# Altium PCB Main.PcbDoc (part 1 of 3)
Units mm, origin at the board's own origin, x right, y up, seen from the top; angles counter-clockwise.
Board outline 100 x 100 mm, 4 copper layers (Top Layer, Layer 2, Layer 3, Bottom Layer), stack 1.606 mm thick; 196 components, 147 nets, 684 pads, 739 vias.
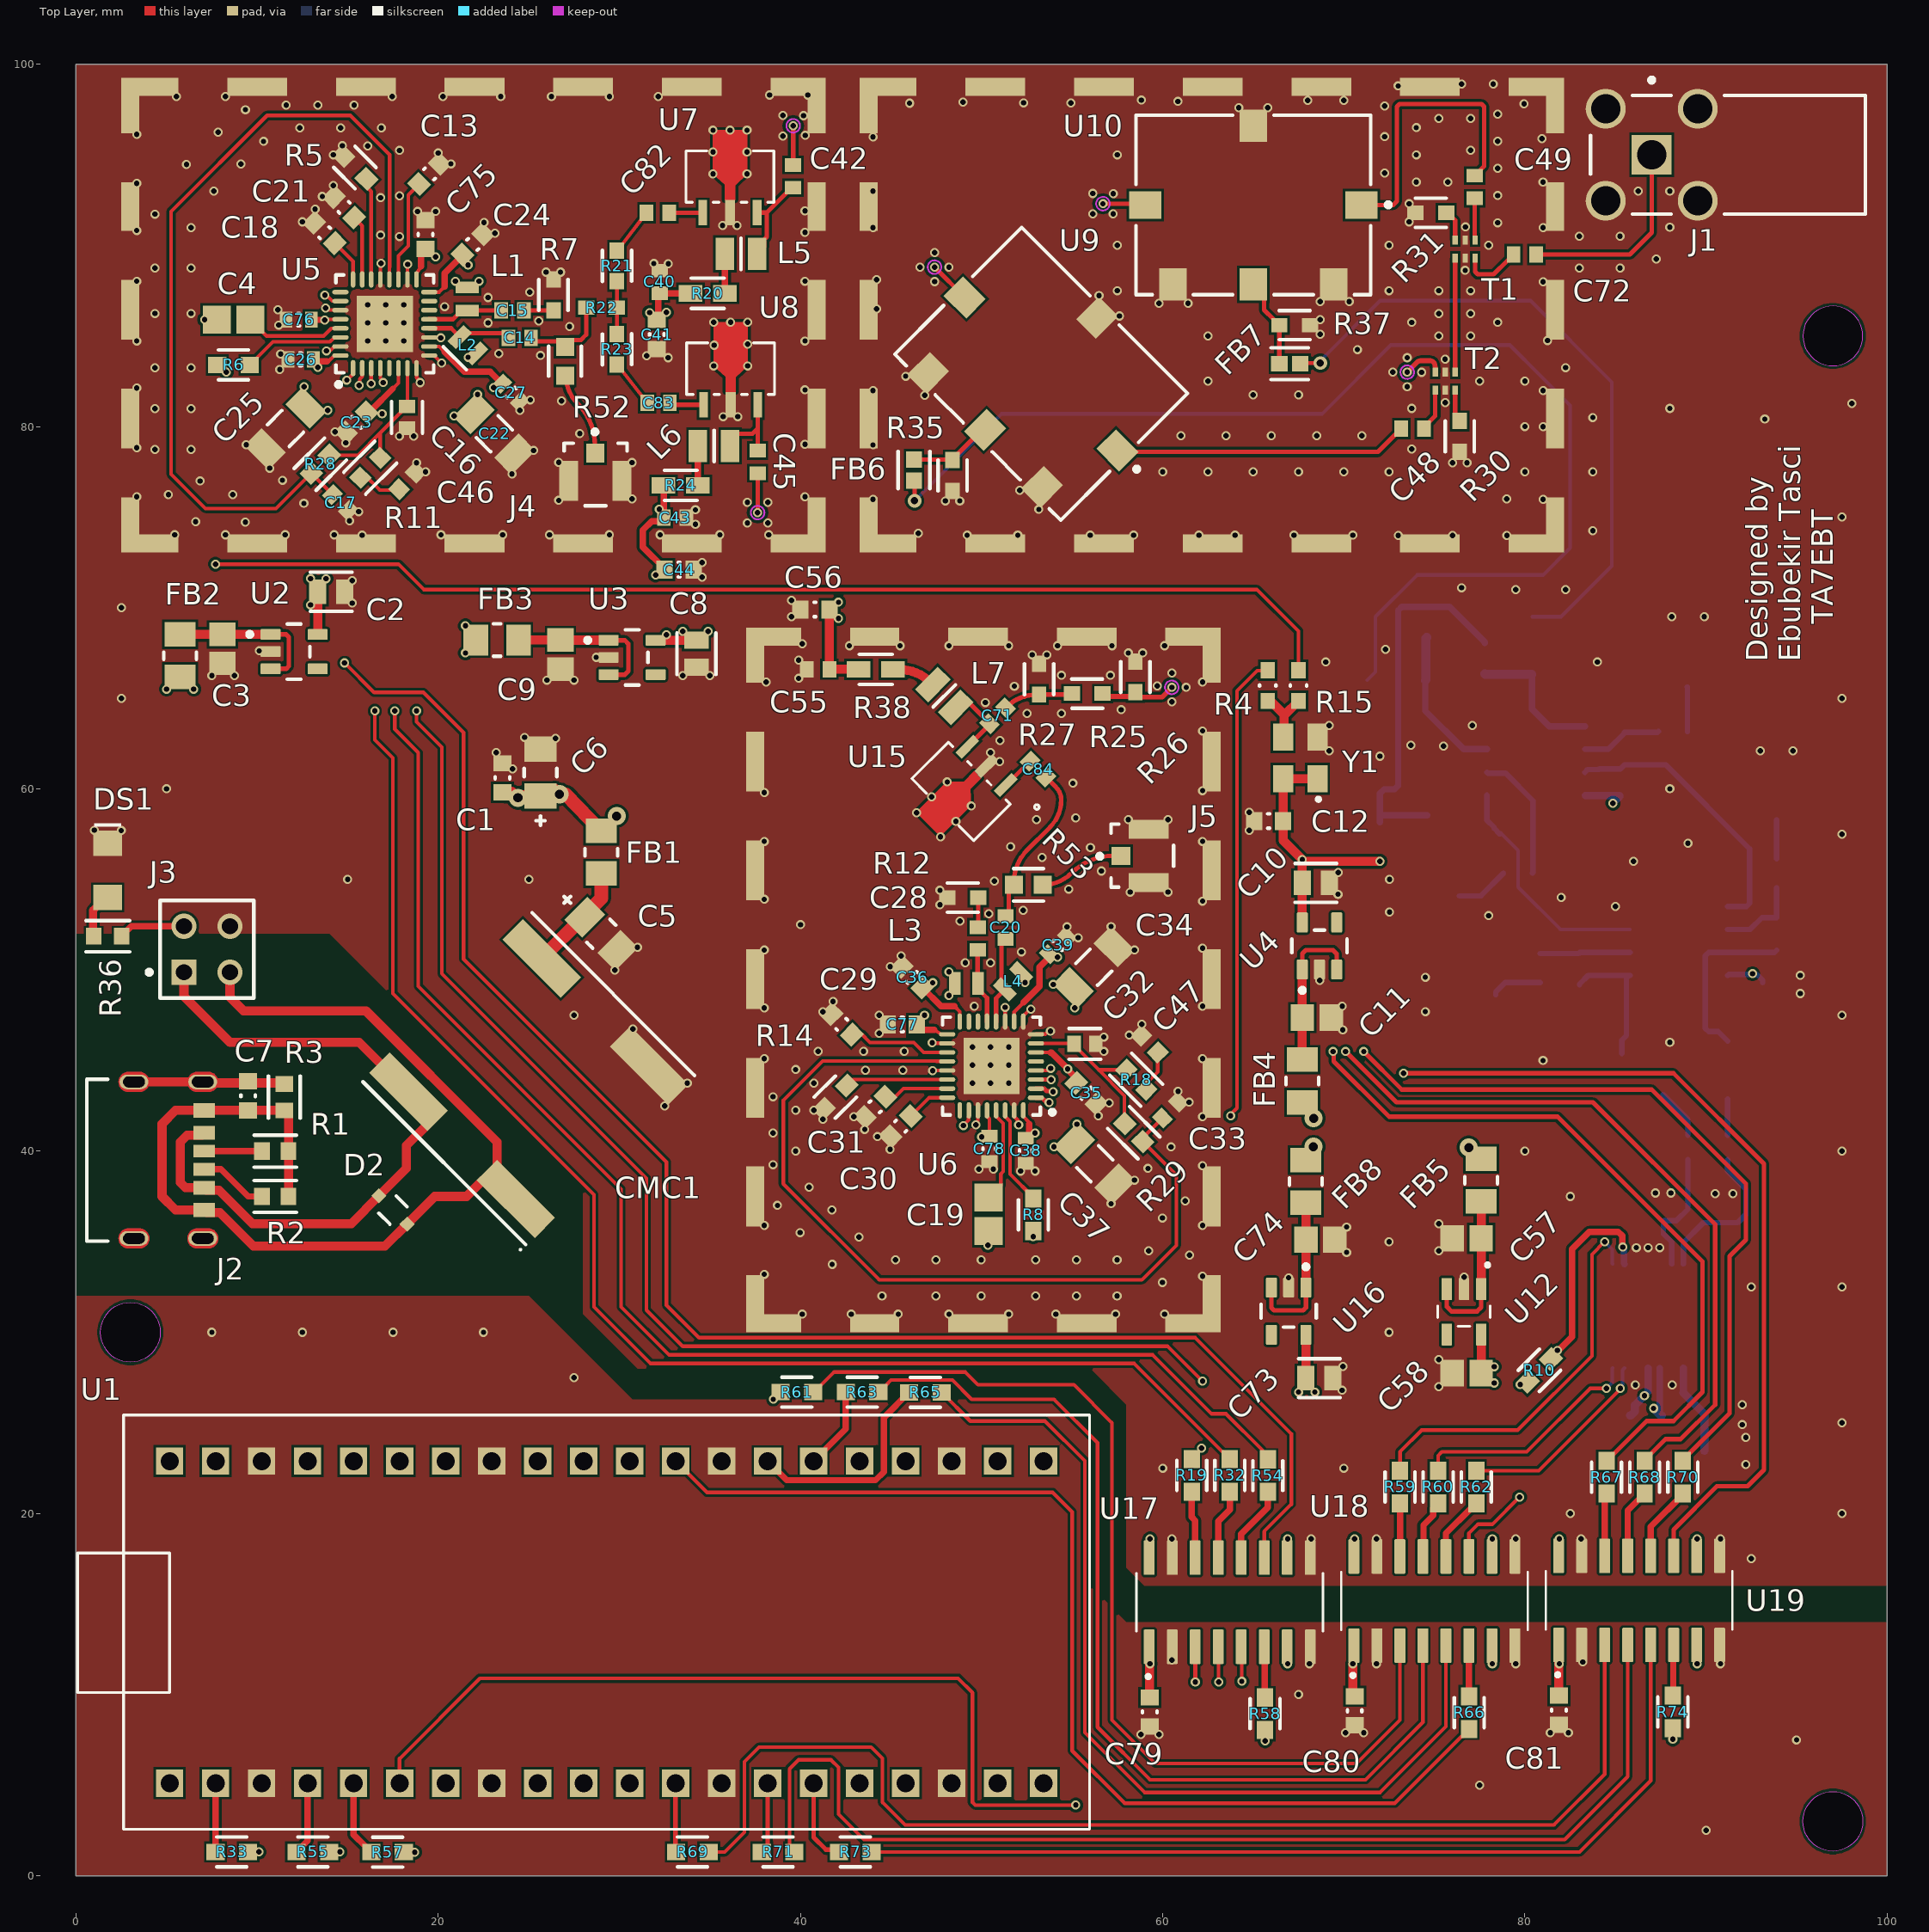
[diagram p0: Top Layer view]
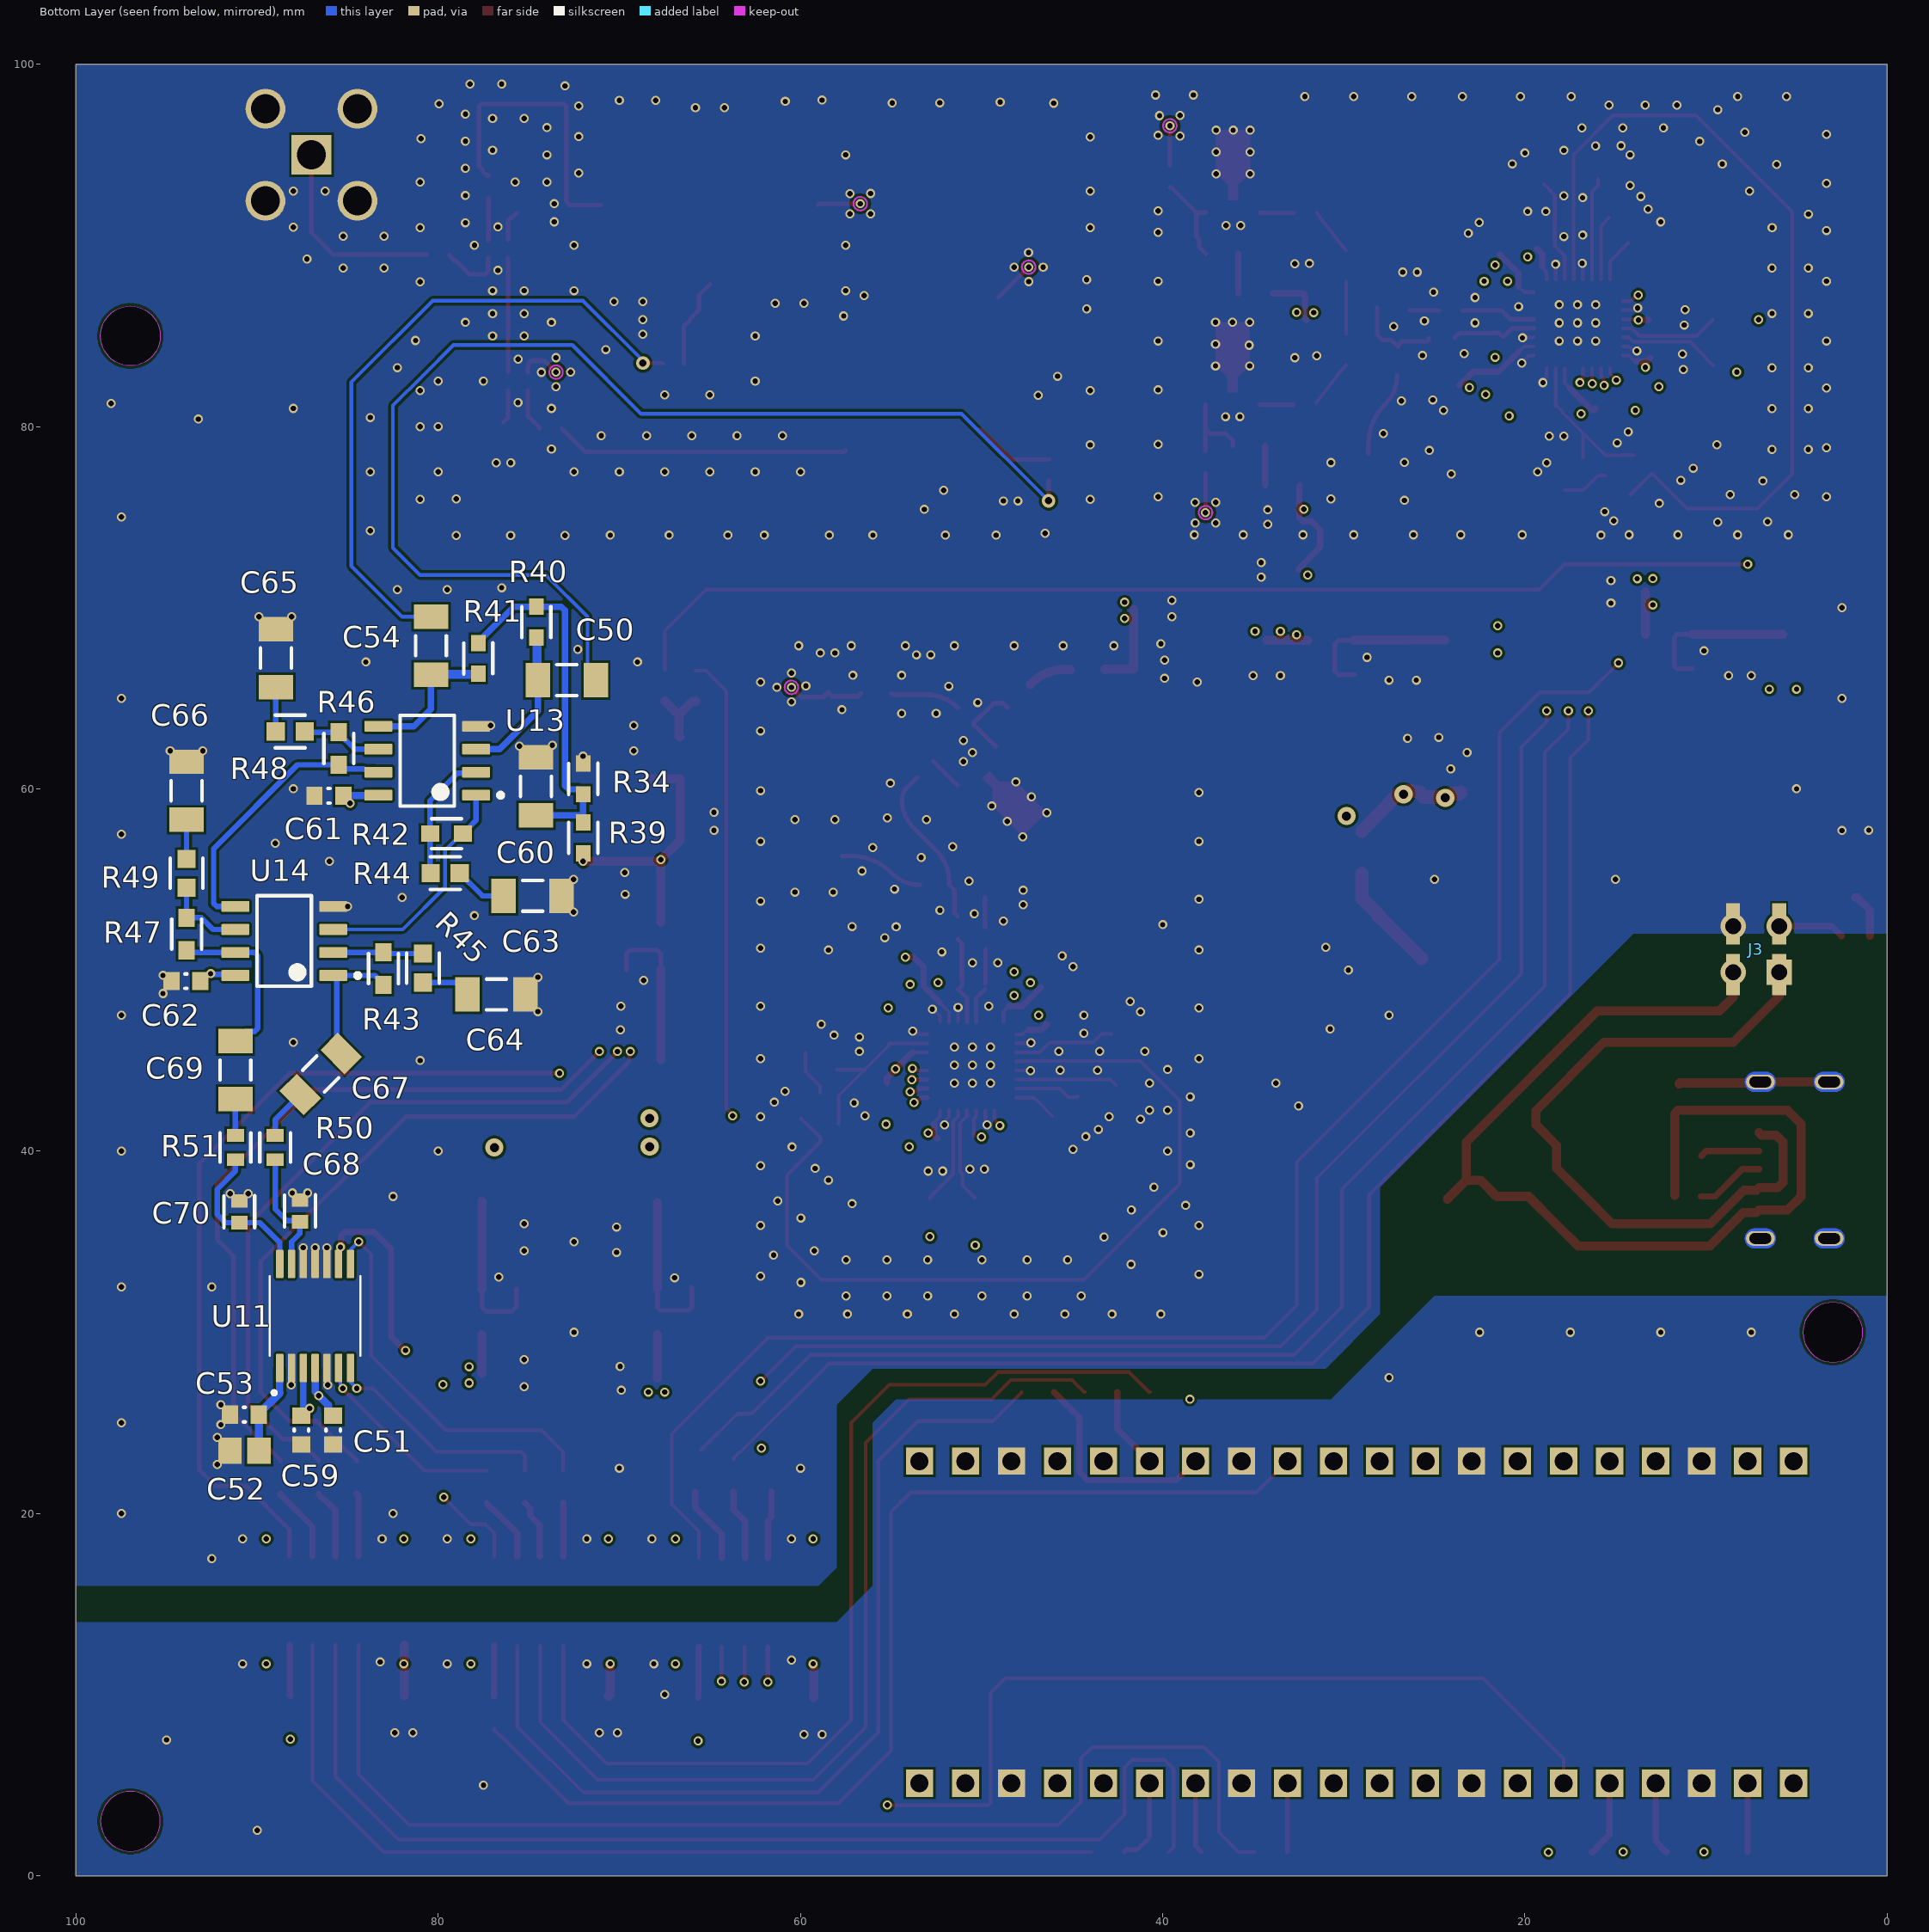
[diagram p1: Bottom Layer view, seen from below]
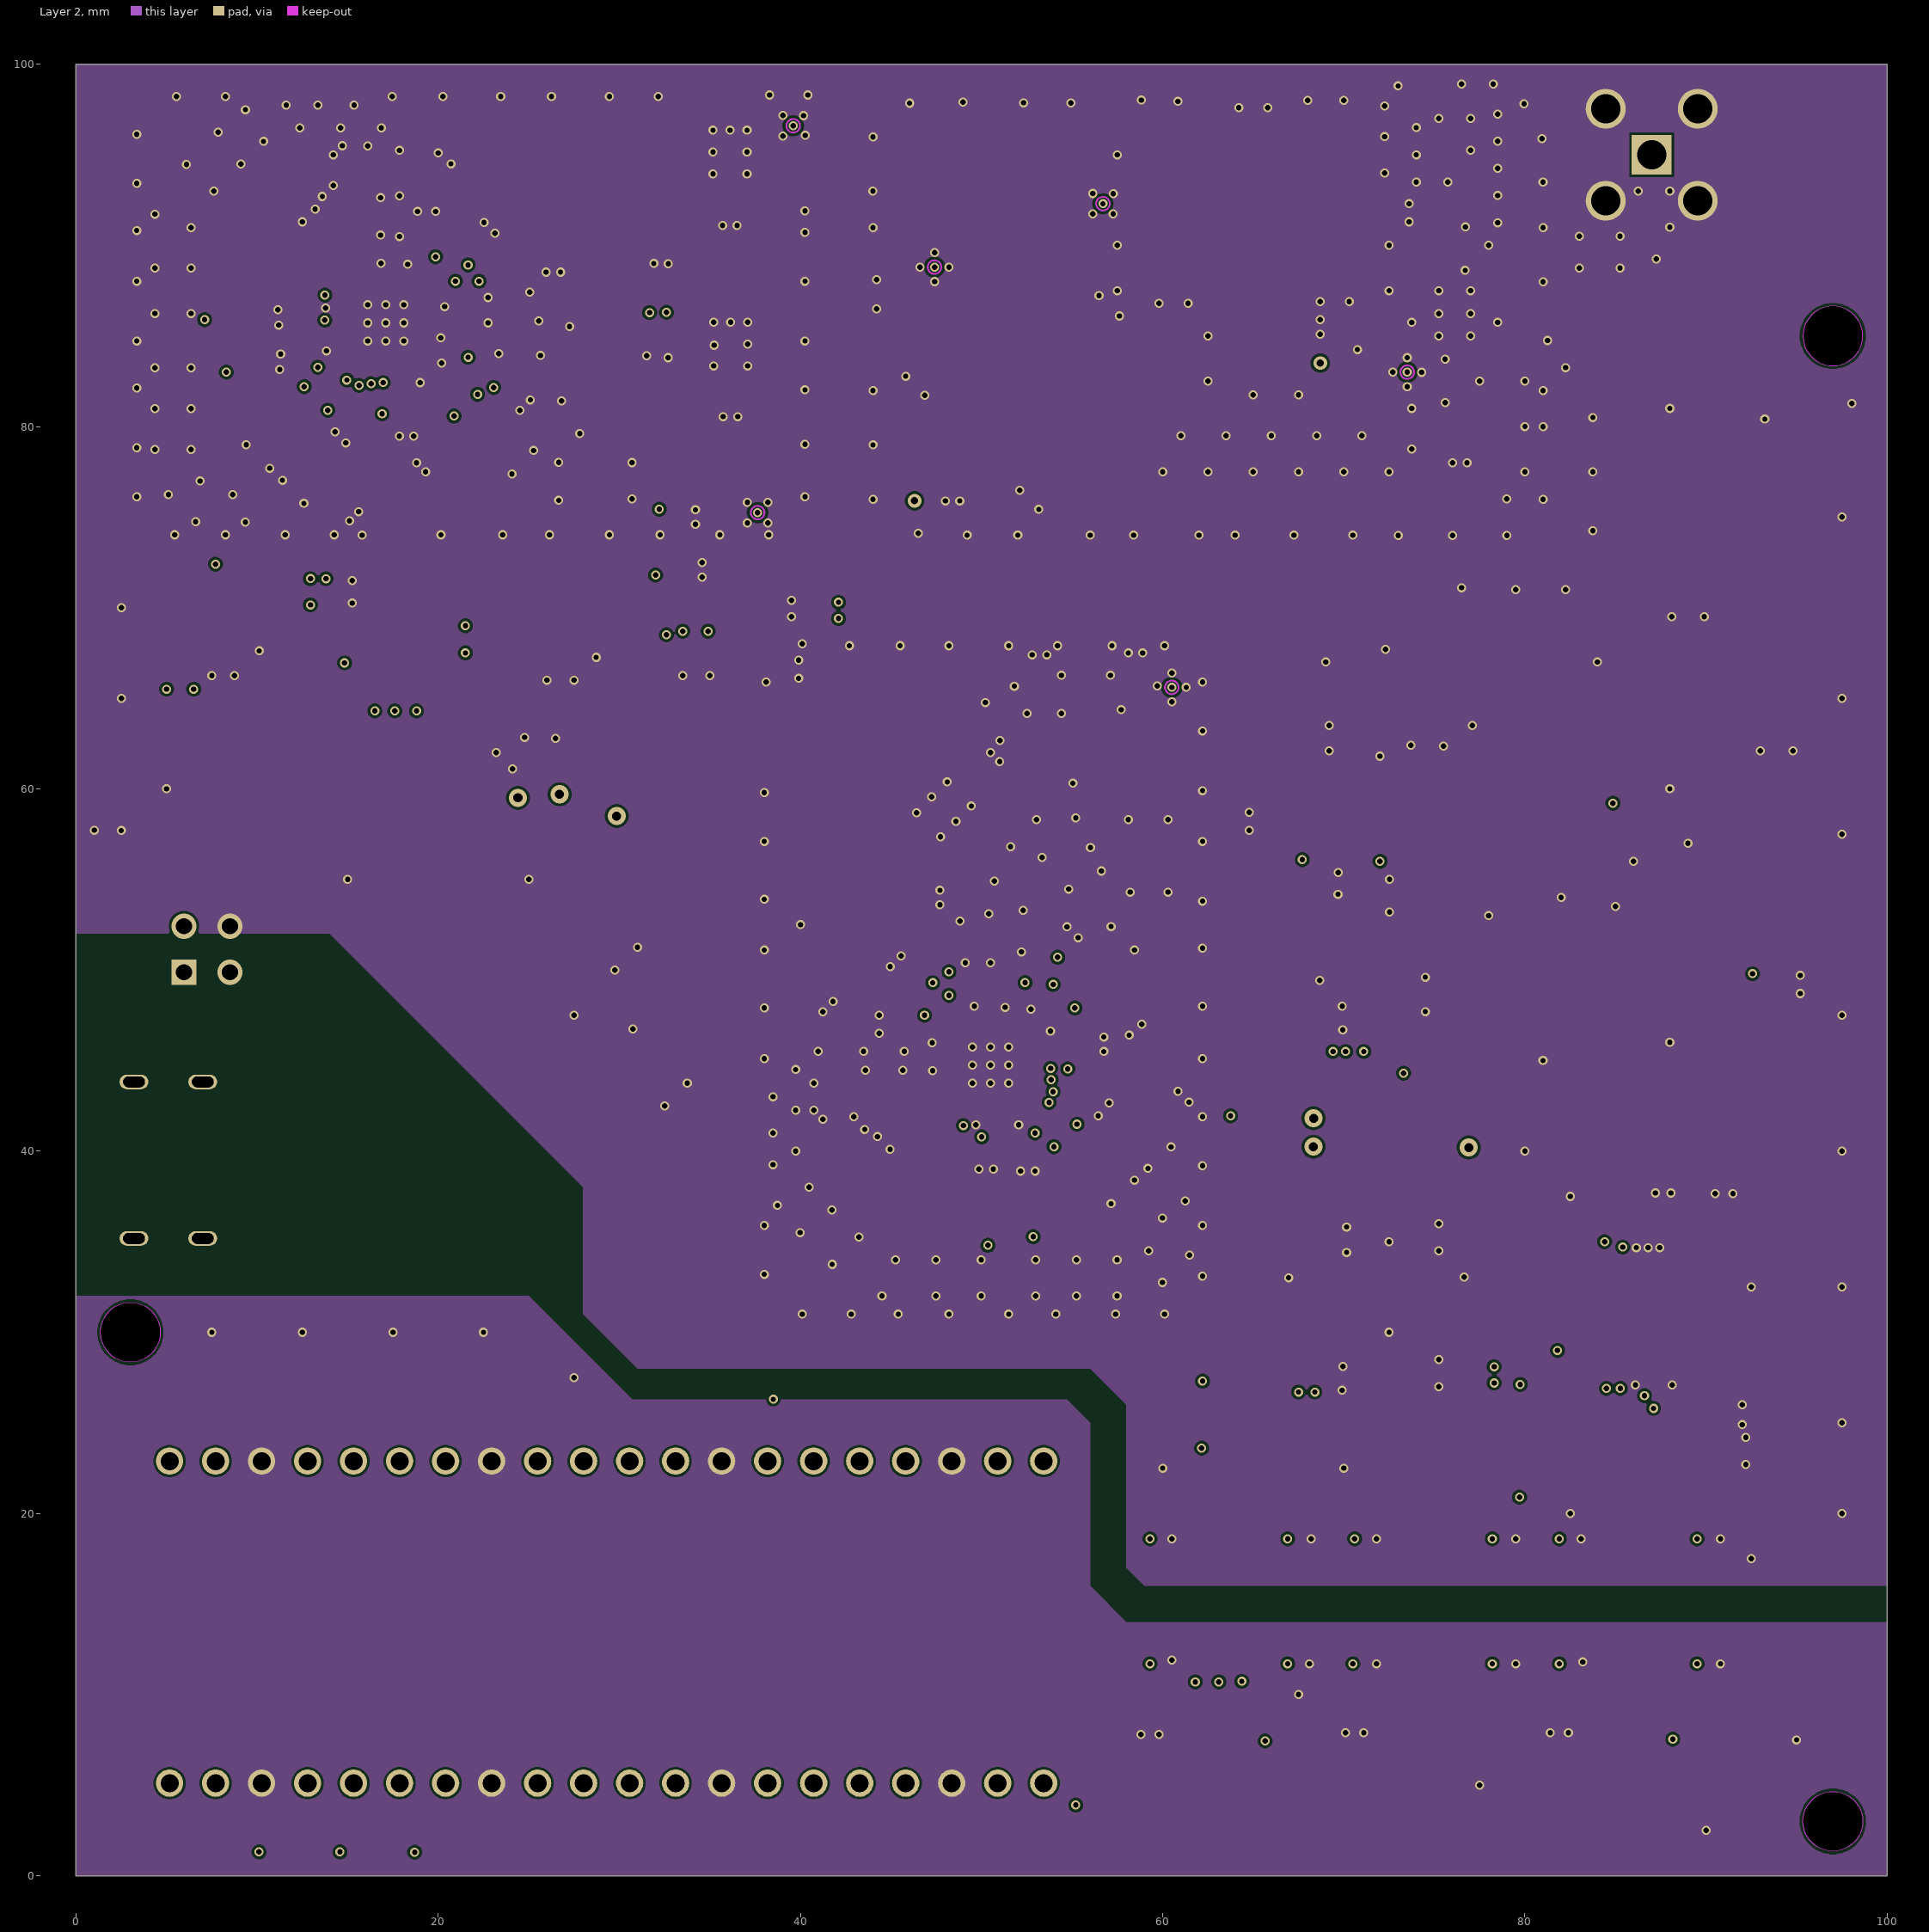
[diagram p2: Layer 2]
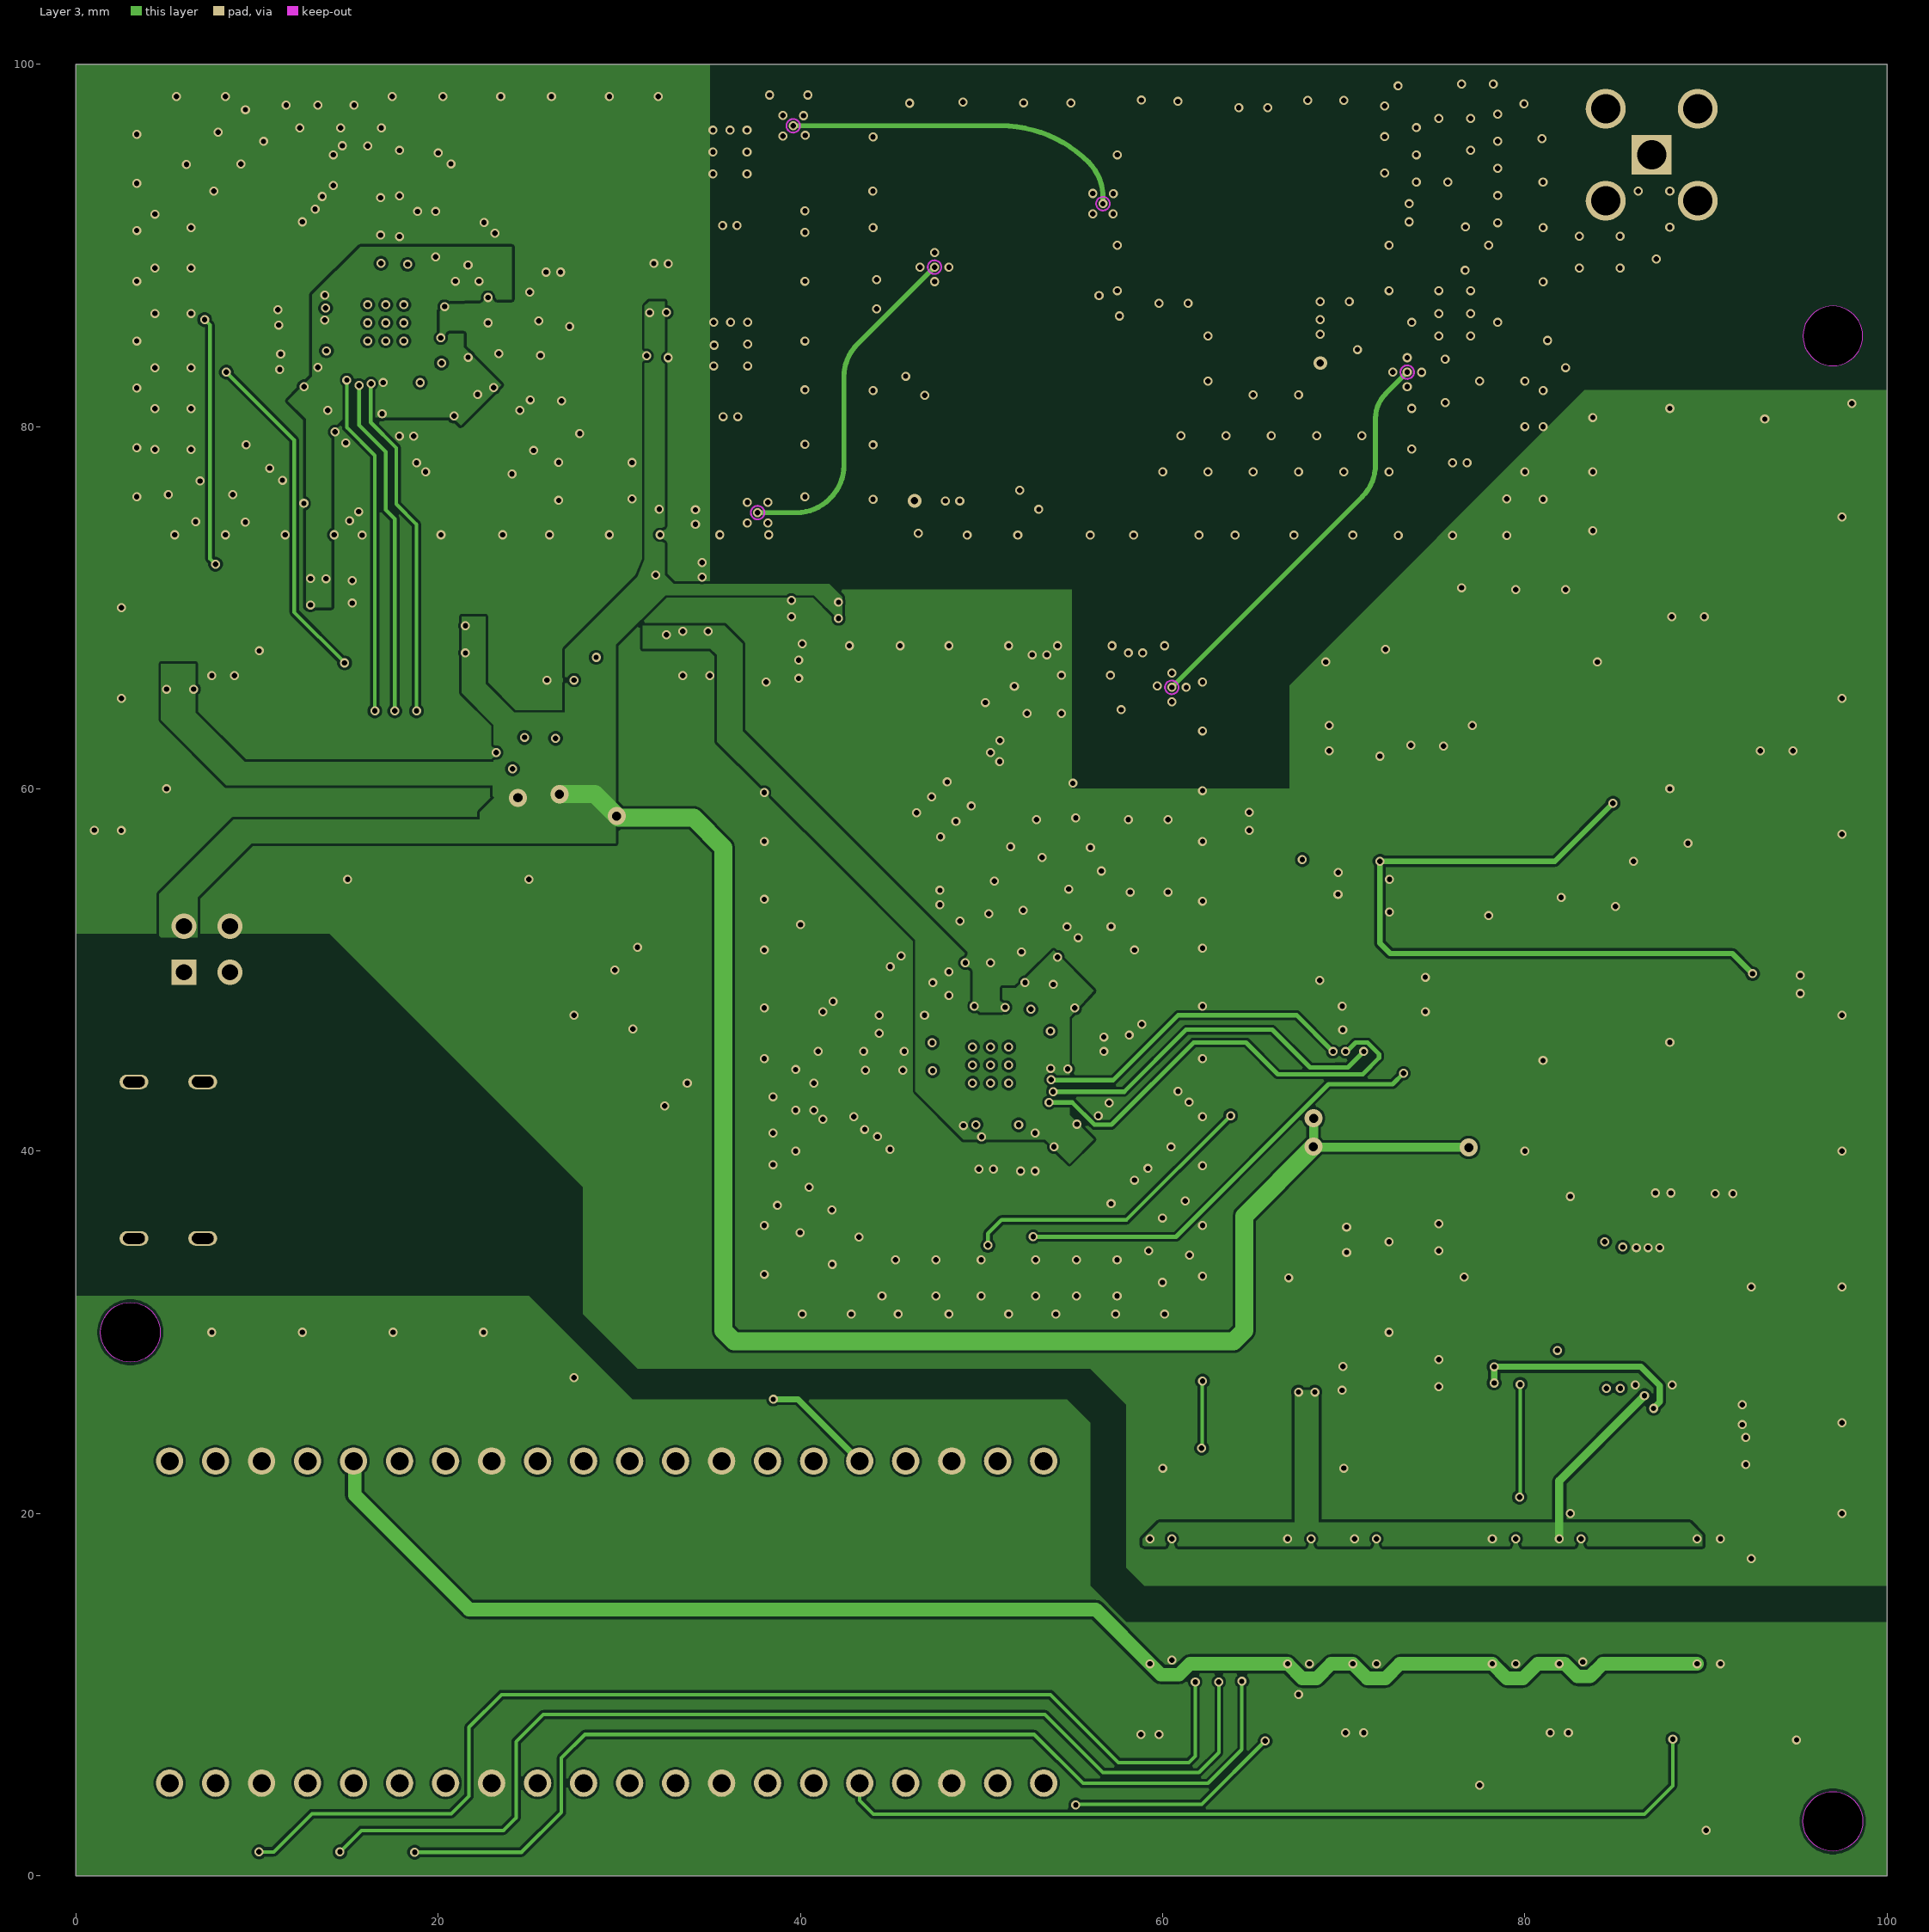
[diagram p3: Layer 3]
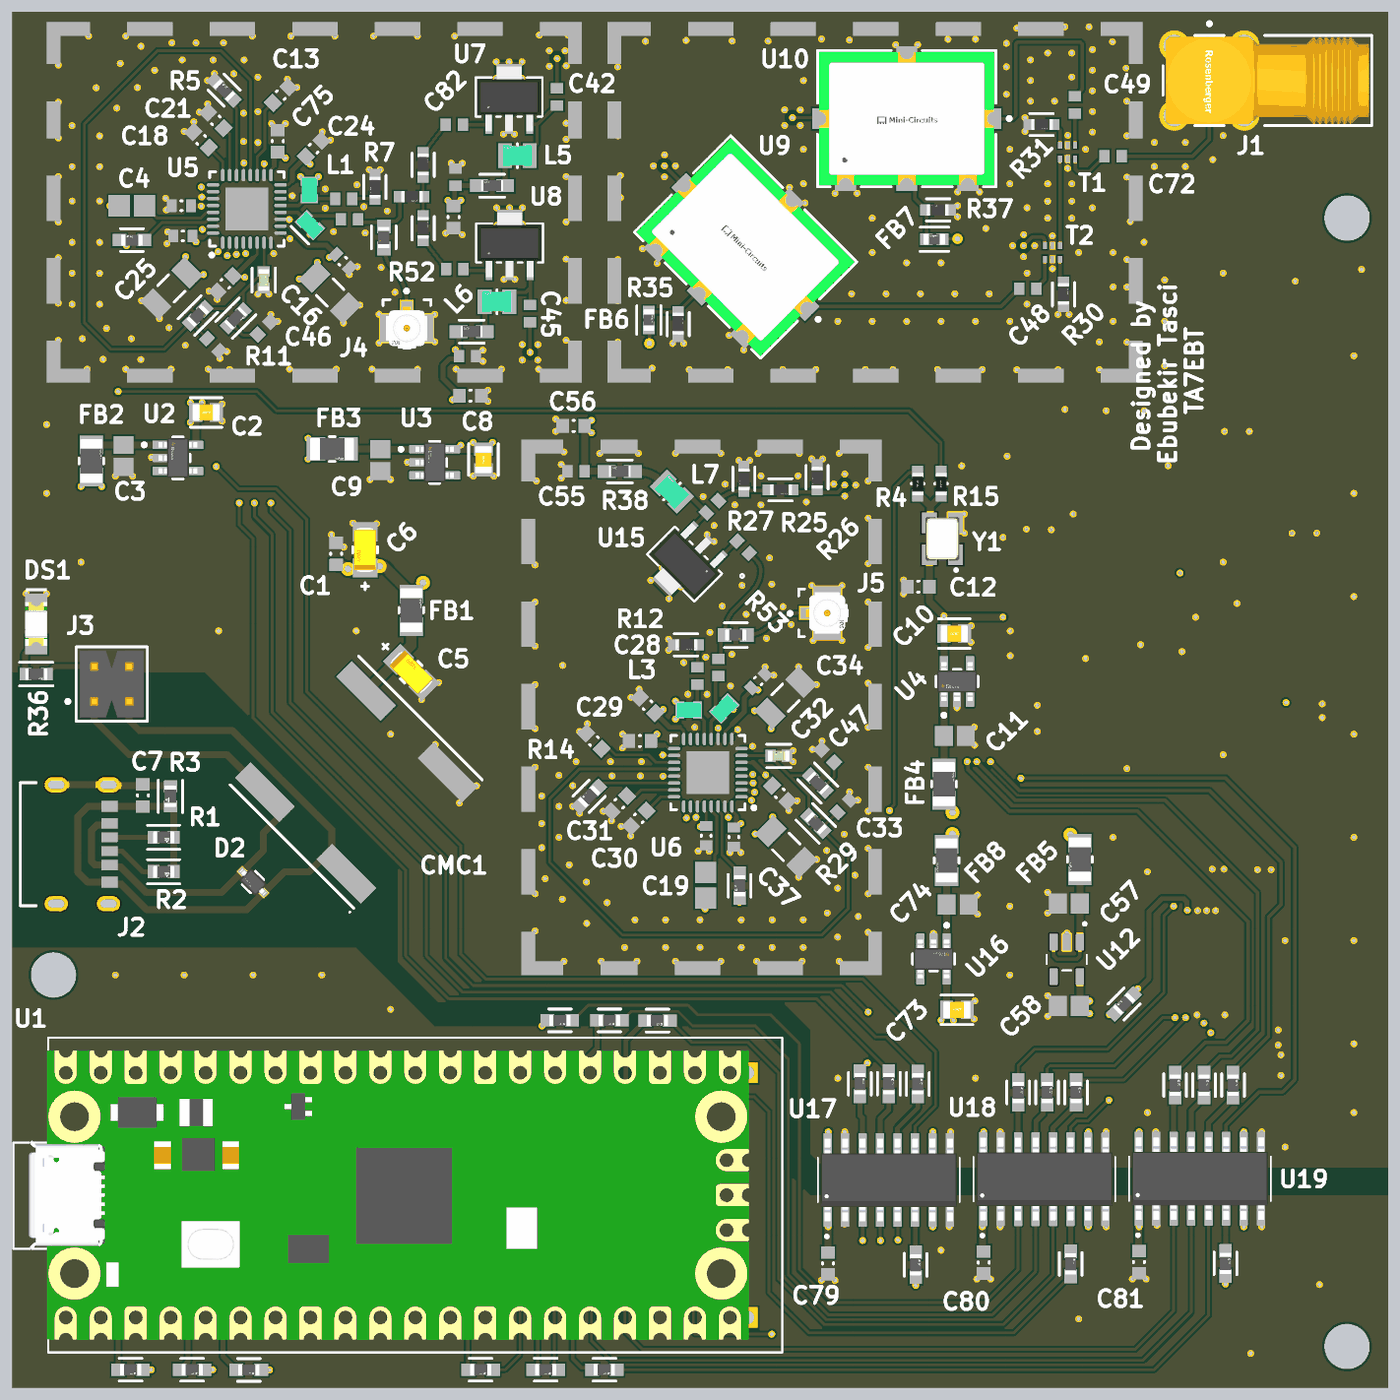
[diagram p5: 3D render of the assembled board from above, using the file's embedded part models]
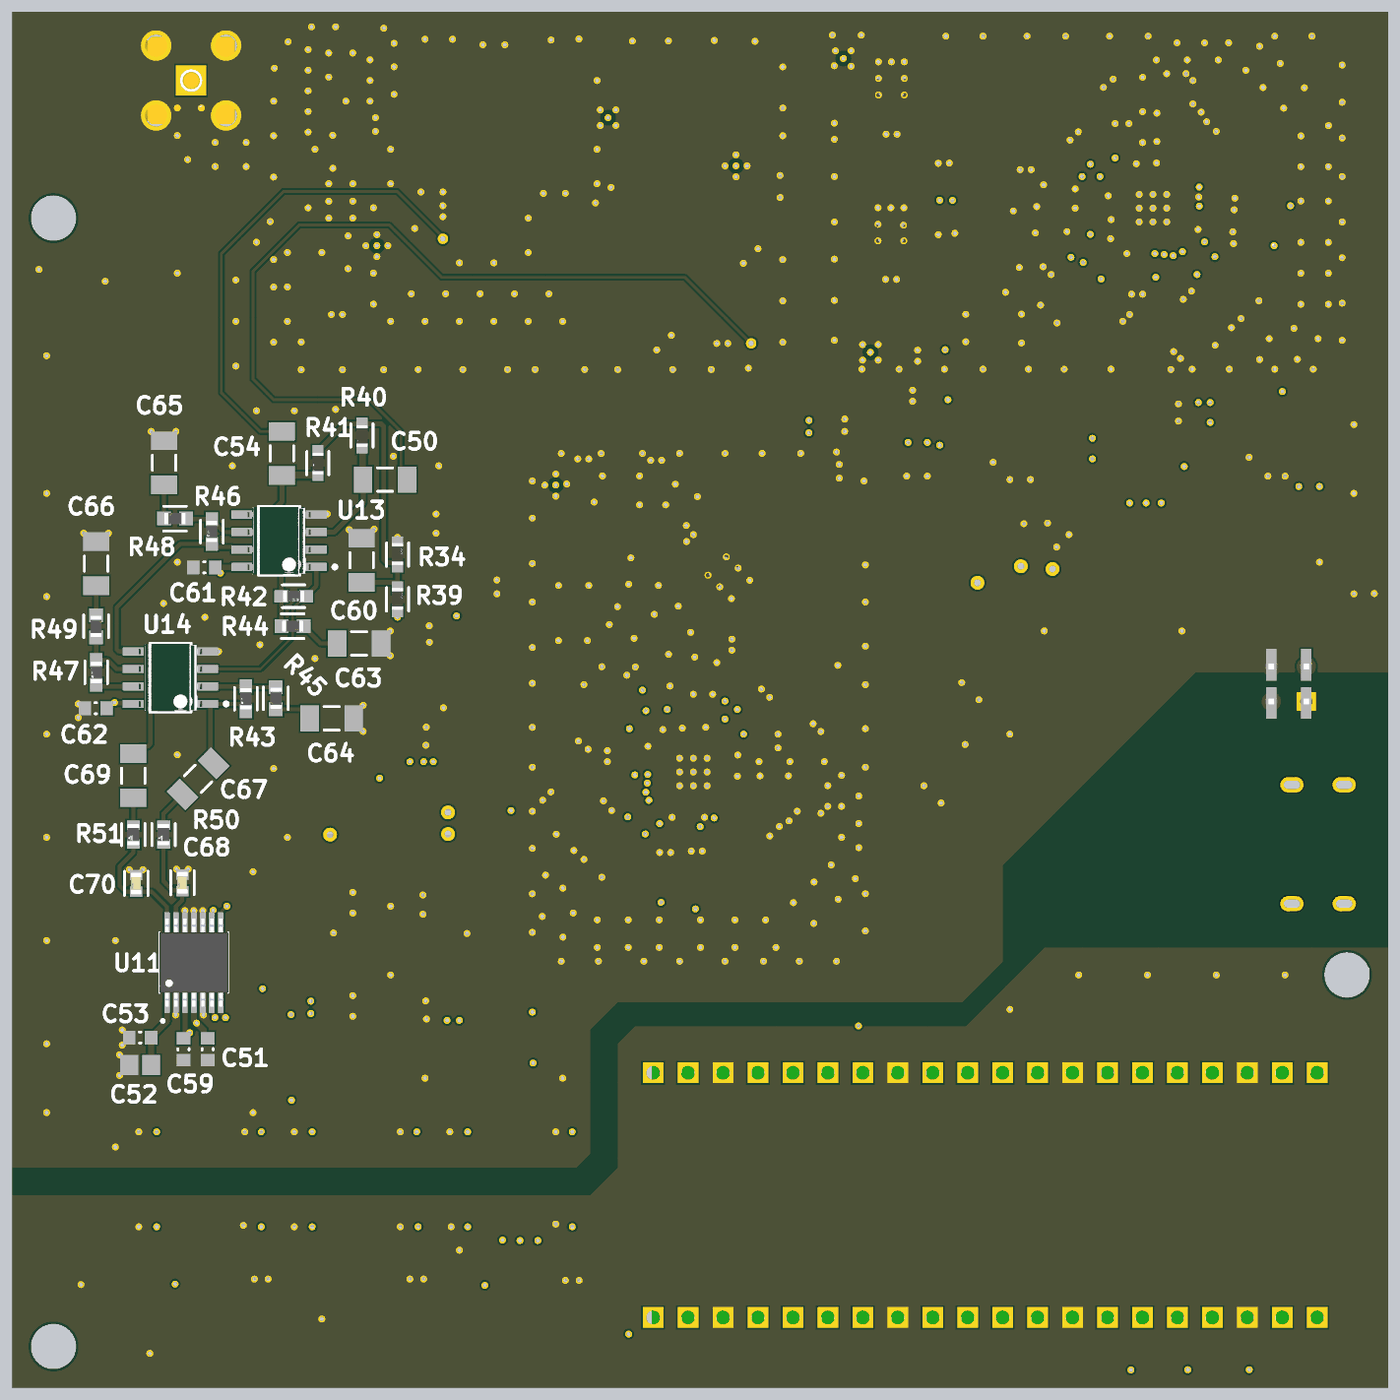
[diagram p6: 3D render of the assembled board from below, using the file's embedded part models]

## Layer stack, top to bottom
Top Solder: solder mask 0.0254, SM-001, Dk 3.8
Top Layer: signal copper 0.035
Dielectric 2: prepreg 0.2028, PP-022, Dk 4.5
Layer 2: signal copper 0.015
Dielectric 3: core 1.1, Core-039, Dk 4.8
Layer 3: signal copper 0.015
Dielectric 4: prepreg 0.2028, PP-022, Dk 4.5
Bottom Layer: signal copper 0.035
Bottom Solder: solder mask 0.0254, SM-001, Dk 3.8

## Board outline
0,0 100,0 100,100 0,100
cut-out: 95.35,85 ccw(c97,85) 97,83.35 ccw(c97,85) 98.65,85 ccw(c97,85) 97,86.65 ccw(c97,85)
cut-out: 1.35,30 cw(c3,30) 3,31.65 cw(c3,30) 4.65,30 cw(c3,30) 3,28.35 cw(c3,30)
cut-out: 95.35,3 cw(c97,3) 97,4.65 cw(c97,3) 98.65,3 cw(c97,3) 97,1.35 cw(c97,3)

## Design rules (kind name [scope] priority, off if disabled: settings)
Clearance [All] p1: gap=0.125 ignorepadtopadclearanceinfootprint=TRUE except(0.15: Arc-Fill Arc-Poly Arc-Region Track-Fill Track-Poly Track-Region Via-Fill Via-Poly Via-Region Fill-Fill Fill-Poly Fill-Region Poly-Poly Poly-Region Region-Region)
HoleSize [All] p1: absolutevalues=TRUE maxlimit=6.35 minlimit=0.3 maxpercent=80.000 minpercent=20.000 // JLCPCB_Min_0.3mm
HoleToHoleClearance [All] p1: gap=0.2 allowstackedmicrovias=TRUE // JLCPCB_SafeMin_20mil
MinimumSolderMaskSliver [All] p1: minsoldermaskwidth=0.1
PlaneClearance [All] p1: clearance=0.254
PlaneConnect [All] p1: planeconnectstyle=Direct reliefexpansion=0.254 reliefentries=4 reliefconductorwidth=0.254 reliefairgap=0.254
PolygonConnect [All] p1: connectstyle=Direct reliefconductorwidth=0.254 reliefentries=4 polygonreliefangle="90 Angle" airgapwidth=0.254
RoutingVias [All] p1: holewidth=0.305 width=0.457 viastyle="Through Hole" minholewidth=0.305 minwidth=0.457 maxholewidth=3.302 maxwidth=6.35 // JLCPCB_UserSpec_0.3mmHole_0.45mmDia
ShortCircuit AllowRF [InComponent('FL1') vs InNet('GND')] p1: allowed=TRUE
ShortCircuit [All] p2: allowed=FALSE
SilkToSilkClearance [All] p1: silktosilkclearance=0.152
SilkToSolderMaskClearance [IsPad] p1: minsilkscreentomaskgap=0.152 clearancetoexposedcopper=TRUE // JLCPCB_Standard_0.15mm
SolderMaskExpansion Via_Expansion [IsVia] p1: expansion=0 istentingtop=FALSE
SolderMaskExpansion [All] p2: expansion=0 istentingtop=FALSE // JLCPCB_Standard
SupplyNets "Schematic Supply Nets_1" [InNet('PICO_GND')] p1: voltage=0.000
SupplyNets "Schematic Supply Nets_4" [InNet('USB_GND')] p2: voltage=0.000
SupplyNets "Schematic Supply Nets" [InNet('GND')] p3: voltage=0.000
Width [All] p1: maxlimit=2.54 minlimit=0.127 preferedwidth=0.254 // JLCPCB_Standard_5mil
22 further rules are at their usual default settings.

## Classes and differential pairs
component class Power: C1 C2 C3 C5 C6 C7 C8 C9 C10 C11 C57 C58 C73 C74 CMC1 D2 DS1 FB1 FB2 FB3 FB4 FB5 FB8 J2 J3 R1 R2 R3 R36 U2 U3 U4 U12 U16
component class Main: C4 C12 C13 C14 C15 C16 C17 C18 C19 C20 C21 C22 C23 C24 C25 C26 C27 C28 C29 C30 C31 C32 C33 C34 C35 C36 C37 C38 C39 C40 C41 C42 C43 C44 C45 C46 C47 C48 C49 C50 C51 C52 C53 C54 C55 C56 C59 C60 C61 C62 C63 C64 C65 C66 C67 C68 C69 C70 C71 C72 C75 C76 C77 C78 C79 C80 C81 C82 C83 C84 FB6 FB7 J1 J4 J5 L1 L2 L3 L4 L5 L6 L7 R4 R5 R6 R7 R8 R10 R11 R12 R14 R15 R18 R19 R20 R21 R22 R23 R24 R25 R26 R27 R28 R29 R30 R31 R32 R33 R34 R35 R37 R38 R39 R40 R41 R42 R43 R44 R45 R46 R47 R48 R49 R50 R51 R52 R53 R54 R55 R57 R58 R59 R60 R61 R62 R63 R65 R66 R67 R68 R69 R70 R71 R73 R74 T1 T2 U1 U5 U6 U7 U8 U9 U10 U11 U13 U14 U15 U17 U18 U19 Y1

## Components (designator, comment, footprint, x,y, rotation, side; value= is the part's Value field where it differs from the comment)
C1 "100nF 0603" CAPC0603(1608)100_N 23.542,60.608 r270 top value=100nF
C2 "2.2uF 0805" FP-C0805C225K4RACAUTO-MFG 14.093,70.878 r0 top
C3 "1uF 0805" CAPC2013X145X50NL20T25 8.089,67.724 r90 top
C4 "0805 10nF" CAPC2013X94X50ML20T25 8.696,85.9 r0 top
C5 "10uF 1206" FP-TAJA-MFG 29,52 r135 top
C6 "10uF 1206" FP-TAJA-MFG 25.646,60.896 r270 top
C7 "10nF 0603" CAPC0603(1608)100_N 9.5,43.05 r90 top value=10nF
C8 "2.2uF 0805" FP-C0805C225K4RACAUTO-MFG 34.25,67.453 r270 top
C9 "1uF 0805" CAPC2013X145X50NL20T25 26.75,67.414 r90 top
C10 "2.2uF 0805" FP-C0805C225K4RACAUTO-MFG 68.458,54.804 r0 top
C11 "1uF 0805" CAPC2013X145X50NL20T25 68.508,47.371 r180 top
C12 "100nF 0603" CAPC0603(1608)100_N 65.85,58.221 r0 top value=100nF
C13 "100nF 0603" CAPC0603(1608)100_N 19.516,93.945 r45 top value=100nF
C14 "100pF 0603" CAPC1608X92X38LL15T08 24.5,84.9 r0 top
C15 "100pF 0603" CAPC1608X92X38LL15T08 24.1,86.4 r0 top
C16 "1.8nF 0603" FP-C0603C-CF-MFG 18.28,80.508 r270 top value="1,800 pF"
C17 "270pF 0603" CAPC1608X92X38LL15T08 14.6,75.8 r135 top
C18 "100nF 0603" CAPC0603(1608)100_N 13.725,90.69 r135 top value=100nF
C19 "0805 10nF" CAPC2013X94X50ML20T25 50.385,36.517 r90 top
C20 "100pF 0603" CAPC1608X92X38LL15T08 51.324,52.344 r90 top
C21 "100nF 0603" CAPC0603(1608)100_N 14.8,92.1 r135 top value=100nF
C22 "10uF 1206" CAPC1206(3216)190_M 23.1,79.6 r315 top value=10uF
C23 "100nF 0603" CAPC0603(1608)100_N 15.482,80.225 r45 top value=100nF
C24 "100nF 0603" CAPC0603(1608)100_N 21.905,90.05 r225 top value=100nF
C25 "10uF 1206" CAPC1206(3216)190_M 11.567,79.891 r45 top value=10uF
C26 "100nF 0603" CAPC0603(1608)100_L 12.4,83.7 r180 top value=100nF
C27 "100nF 0603" CAPC0603(1608)100_L 24.015,81.873 r315 top value=100nF
C28 "100pF 0603" CAPC1608X92X38LL15T08 49.783,51.733 r90 top
C29 "100nF 0603" CAPC0603(1608)100_N 42.276,46.998 r135 top value=100nF
C30 "100nF 0603" CAPC0603(1608)100_N 45.53,41.378 r225 top value=100nF
C31 "100nF 0603" CAPC0603(1608)100_N 44.12,42.448 r225 top value=100nF
C32 "1.8nF 0603" FP-C0603C-CF-MFG 55.704,45.919 r0 top value="1,800 pF"
C33 "270pF 0603" CAPC1608X92X38LL15T08 60.424,42.265 r225 top
C34 "10uF 1206" CAPC1206(3216)190_M 56.194,50.15 r45 top value=10uF
C35 "100nF 0603" CAPC0603(1608)100_N 55.784,43.198 r135 top value=100nF
C36 "100nF 0603" CAPC0603(1608)100_N 46.165,49.597 r315 top value=100nF
C37 "10uF 1206" CAPC1206(3216)190_M 56.248,39.304 r135 top value=10uF
C38 "100nF 0603" CAPC0603(1608)100_L 52.439,40.021 r270 top value=100nF
C39 "100nF 0603" CAPC0603(1608)100_L 54.215,51.36 r45 top value=100nF
C40 "100pF 0603" CAPC1608X92X38LL15T08 32.221,87.98 r270 top
C41 "100nF 0603" CAPC0603(1608)100_N 32.071,85.078 r90 top value=100nF
C42 "100pF 0603" CAPC1608X92X38LL15T08 39.592,93.809 r90 top
C43 "100pF 0603" CAPC1608X92X38LL15T08 33.081,74.963 r180 top
C44 "100nF 0603" CAPC0603(1608)100_N 33.3,72.1 r180 top value=100nF
C45 "100pF 0603" CAPC1608X92X38LL15T08 37.635,78.048 r270 top
C46 "56nF 0603" CAPC1608X90X35LL15T15 18.3,77 r225 top
C47 "56nF 0603" CAPC1608X90X35LL15T15 59.27,45.915 r315 top
C48 "100pF 0603" CAPC1608X92X38LL15T08 73.8,79.881 r0 top
C49 "100pF 0603" CAPC1608X92X38LL15T08 77.229,93.227 r270 top
C50 "10uF 1206" CAPC1206(3216)190_M 72.9,66 r0 bottom value=10uF
C51 "100nF 0603" CAPC0603(1608)100_N 85.8,24.6 r90 bottom value=100nF
C52 "1uF 0805" CAPC2013X145X50NL20T25 90.7,23.452 r180 bottom
C53 "100nF 0603" CAPC0603(1608)100_N 90.703,25.456 r180 bottom value=100nF
C54 "10uF 1206" CAPC1206(3216)190_M 80.4,67.9 r270 bottom value=10uF
C55 "100pF 0603" CAPC1608X92X38LL15T08 40.975,66.6 r0 top
C56 "100nF 0603" CAPC0603(1608)100_N 40.8,69.9 r0 top value=100nF
C57 "1uF 0805" CAPC2013X145X50NL20T25 76.784,35.192 r0 top
C58 "1uF 0805" CAPC2013X145X50NL20T25 76.784,27.745 r0 top
C59 "100nF 0603" CAPC0603(1608)100_N 87.554,24.6 r90 bottom value=100nF
C60 "10uF 1206" CAPC1206(3216)190_M 74.604,60.136 r270 bottom value=10uF
C61 "100nF 0603" CAPC0603(1608)100_N 86.037,59.62 r180 bottom value=100nF
C62 "100nF 0603" CAPC0603(1608)100_N 93.929,49.381 r180 bottom value=100nF
C63 "10uF 1206" CAPC1206(3216)190_M 74.791,54.092 r0 bottom value=10uF
C64 "10uF 1206" CAPC1206(3216)190_M 76.788,48.645 r0 bottom value=10uF
C65 "10uF 1206" CAPC1206(3216)190_M 88.963,67.22 r270 bottom value=10uF
C66 "10uF 1206" CAPC1206(3216)190_M 93.9,59.893 r270 bottom value=10uF
C67 "10uF 1206" CAPC1206(3216)190_M 86.491,44.257 r315 bottom value=10uF
C68 "1.8nF 0603" FP-C0603C-CF-MFG 87.632,36.7 r90 bottom value="1,800 pF"
C69 "10uF 1206" CAPC1206(3216)190_M 91.2,44.479 r270 bottom value=10uF
C70 "1.8nF 0603" FP-C0603C-CF-MFG 90.989,36.653 r90 bottom value="1,800 pF"
C71 "100pF 0603" CAPC1608X92X38LL15T08 50.877,64.034 r45 top
C72 "100pF 0603" CAPC1608X92X38LL15T08 80,89.5 r0 top
C73 "2.2uF 0805" FP-C0805C225K4RACAUTO-MFG 68.653,27.463 r0 top
C74 "1uF 0805" CAPC2013X145X50NL20T25 68.703,35.117 r180 top
C75 "100nF 0603" CAPC0603(1608)100_N 19.3,90.6 r270 top value=100nF
C76 "100nF 0603" CAPC0603(1608)100_L 12.3,85.9 r180 top value=100nF
C77 "100nF 0603" CAPC0603(1608)100_N 45.621,47.002 r0 top value=100nF
C78 "100nF 0603" CAPC0603(1608)100_L 50.43,40.121 r270 top value=100nF
C79 "100nF 0603" CAPC0603(1608)100_N 59.283,9.041 r90 top value=100nF
C80 "100nF 0603" CAPC0603(1608)100_N 70.599,9.105 r90 top value=100nF
C81 "100nF 0603" CAPC0603(1608)100_N 81.88,9.137 r90 top value=100nF
C82 "100pF 0603" CAPC1608X92X38LL15T08 32.127,91.795 r180 top
C83 "100pF 0603" CAPC1608X92X38LL15T08 32.161,81.3 r0 top
C84 "100pF 0603" CAPC1608X92X38LL15T08 53.117,61.087 r135 top
CMC1 "PA2748NL" DFN838P1270X560-4N 25,44 r135 top
D2 "PESD5V0S1BA,115" FP-SOD323-CA-MFG 17.5,36.75 r135 top
DS1 "150120VS75000" WL-SMCW_1206_150120xx75000 1.75,55.5 r270 top
FB1 "LCB3216-102Y-N" FP-BLM31-0_2-t1_6-IPC_C 29,56.5 r90 top
FB2 "LCB3216-102Y-N" FP-BLM31-0_2-t1_6-IPC_C 5.75,67.348 r90 top
FB3 "LCB3216-102Y-N" FP-BLM31-0_2-t1_6-IPC_C 23.25,68.214 r0 top
FB4 "LCB3216-102Y-N" FP-BLM31-0_2-t1_6-IPC_C 67.708,43.871 r90 top
FB5 "LCB3216-102Y-N" FP-BLM31-0_2-t1_6-IPC_C 77.584,38.399 r270 top
FB6 "BLM18HE152SN1D" FP-BLM18-0_15-t0_8-IPC_C 46.267,77.598 r90 top
FB7 "BLM18HE152SN1D" FP-BLM18-0_15-t0_8-IPC_C 67.017,83.465 r180 top
FB8 "LCB3216-102Y-N" FP-BLM31-0_2-t1_6-IPC_C 67.903,38.324 r270 top
J1 "32K201-400L5" FP-32K201-400L5-MFG 91.213,95 r270 top
J2 "USB4125-GF-A_REVA2" GCT_USB4125-GF-A_REVA2 4,39.5 r270 top
J3 "5-146256-2" FP-5-146256-2-MFG 7.23,51.145 r0 top
J4 "U.FL-R-SMT-1(80)" FP-U_FL-R-SMT-1_80-MFG 28.676,77.001 r180 top
J5 "U.FL-R-SMT-1(80)" FP-U_FL-R-SMT-1_80-MFG 59.225,56.3 r270 top
L1 "5.6nH 0603" FP-AISC-0603HP-MFG 21.604,87.045 r90 top
L2 "5.6nH 0603" FP-AISC-0603HP-MFG 21.639,84.492 r315 top
L3 "5.6nH 0603" FP-AISC-0603HP-MFG 49.171,49.254 r180 top
L4 "5.6nH 0603" FP-AISC-0603HP-MFG 51.742,49.375 r45 top
L5 "18nH 0805" FP-LQW2BAN_00-MFG 36.715,89.534 r180 top
L6 "18nH 0805" FP-LQW2BAN_00-MFG 35.228,78.931 r180 top
L7 "18nH 0805" FP-LQW2BAN_00-MFG 47.941,65.131 r135 top
R1 "5.1k 0603" FP-MCT0603-IPC_B 11,40 r0 top
R2 "5.1k 0603" FP-MCT0603-IPC_B 11,37.5 r0 top
R3 "1Meg 0603" FP-MCT0603-IPC_B 11.5,42.979 r270 top
R4 "33R 0603" FP-SR0603-MFG 65.8,65.7 r90 top value=33Ω
R5 "4.7k 0603" FP-CPF0603-MFG 15.4,94.3 r315 top value=4.7kΩ
R6 "33R 0603" FP-CPF0603-MFG 8.7,83.4 r0 top value=33Ω
R7 "49.9R 0603" FP-RT0603-MFG 26.361,87.265 r270 top value=49.9Ω
R8 "33R 0603" FP-CPF0603-MFG 52.864,36.488 r90 top value=33Ω
R10 "33R 0603" FP-CPF0603-MFG 80.8,27.9 r45 top value=33Ω
R11 "210R 0603" FP-AC0603-IPC_B 16.247,77.728 r45 top
R12 "49.9R 0603" FP-RT0603-MFG 48.962,53.994 r0 top value=49.9Ω
R14 "4.7k 0603" FP-CPF0603-MFG 41.925,42.981 r45 top value=4.7kΩ
R15 "33R 0603" FP-SR0603-MFG 67.5,65.7 r90 top value=33Ω
R18 "210R 0603" FP-AC0603-IPC_B 58.542,43.944 r135 top
R19 "33R 0603" FP-CPF0603-MFG 61.6,22.1 r270 top value=33Ω
R20 "0R 0603" FP-HCJ0603-MFG 34.875,87.355 r180 top
R21 "16.5R 0603" FP-RT0603-MFG 29.865,88.867 r90 top value=16.5Ω
R22 "16.5R 0603" FP-RT0603-MFG 29.015,86.563 r0 top value=16.5Ω
R23 "16.5R 0603" FP-RT0603-MFG 29.865,84.259 r90 top value=16.5Ω
R24 "0R 0603" FP-HCJ0603-MFG 33.388,76.752 r180 top
R25 "37.4R 0603" FP-RT0603-MFG 55.831,65.258 r0 top value=37.4Ω
R26 "150R 0603" FP-RT0603-MFG 58.492,66.176 r270 top value=150Ω
R27 "150R 0603" FP-RT0603-MFG 53.177,66.056 r270 top value=150Ω
R28 "1.3k 0603" FP-TFCR0603-IPC_B 13.487,77.916 r225 top
R29 "1.3k 0603" FP-TFCR0603-IPC_B 58.404,41.019 r315 top
R30 "49.9R 0603" FP-RT0603-MFG 76.397,79.454 r90 top value=49.9Ω
R31 "49.9R 0603" FP-RT0603-MFG 74.8,91.8 r0 top value=49.9Ω
R32 "33R 0603" FP-CPF0603-MFG 63.704,22.101 r270 top value=33Ω
R33 "33R 0603" FP-CPF0603-MFG 8.605,1.315 r180 top value=33Ω
R34 "10k 0603" FP-RT0603-MFG 72,60.55 r90 bottom value=10KΩ
R35 "49.9R 0603" FP-RT0603-MFG 48.396,77.296 r90 top value=49.9Ω
R36 "210R 0603" FP-AC0603-IPC_B 1.75,51.865 r0 top
R37 "49.9R 0603" FP-RT0603-MFG 67.29,85.594 r180 top value=49.9Ω
R38 "0R 0603" FP-HCJ0603-MFG 44.154,66.593 r180 top
R39 "10k 0603" FP-RT0603-MFG 72,57.296 r90 bottom value=10KΩ
R40 "100k 0603" FP-RT0603-MFG 74.58,69.204 r270 bottom value=100KΩ
R41 "100k 0603" FP-RT0603-MFG 77.789,67.202 r270 bottom value=100KΩ
R42 "4.7k 0603" FP-CPF0603-MFG 79.548,57.523 r0 bottom value=4.7kΩ
R43 "4.7k 0603" FP-CPF0603-MFG 83.021,50.076 r90 bottom value=4.7kΩ
R44 "1k 0603" FP-TFCR0603-MFG 79.618,55.344 r0 bottom
R45 "1k 0603" FP-TFCR0603-MFG 80.842,50.105 r90 bottom
R46 "4.7k 0603" FP-CPF0603-MFG 85.494,62.224 r90 bottom value=4.7kΩ
R47 "4.7k 0603" FP-CPF0603-MFG 93.895,51.985 r90 bottom value=4.7kΩ
R48 "1k 0603" FP-TFCR0603-MFG 88.173,63.166 r180 bottom
R49 "1k 0603" FP-TFCR0603-MFG 93.9,55.339 r270 bottom
R50 "100R 0603" FP-MCT0603-MFG 89,40.2 r270 bottom
R51 "100R 0603" FP-MCT0603-MFG 91.2,40.2 r270 bottom
R52 "1k 0603" FP-TFCR0603-MFG 27,83.6 r90 top
R53 "1k 0603" FP-TFCR0603-MFG 52.583,54.698 r180 top
R54 "33R 0603" FP-CPF0603-MFG 65.808,22.086 r270 top value=33Ω
R55 "33R 0603" FP-CPF0603-MFG 13.073,1.315 r180 top value=33Ω
R57 "33R 0603" FP-CPF0603-MFG 17.2,1.3 r180 top value=33Ω
R58 "33R 0603" FP-CPF0603-MFG 65.655,8.941 r270 top value=33Ω
R59 "33R 0603" FP-CPF0603-MFG 73.104,21.464 r270 top value=33Ω
R60 "33R 0603" FP-CPF0603-MFG 75.208,21.464 r270 top value=33Ω
R61 "33R 0603" FP-CPF0603-MFG 39.8,26.7 r180 top value=33Ω
R62 "33R 0603" FP-CPF0603-MFG 77.312,21.464 r270 top value=33Ω
R63 "33R 0603" FP-CPF0603-MFG 43.4,26.7 r180 top value=33Ω
R65 "33R 0603" FP-CPF0603-MFG 46.894,26.685 r180 top value=33Ω
R66 "33R 0603" FP-CPF0603-MFG 76.919,9.005 r270 top value=33Ω
R67 "33R 0603" FP-CPF0603-MFG 84.508,21.996 r270 top value=33Ω
R68 "33R 0603" FP-CPF0603-MFG 86.612,21.996 r270 top value=33Ω
R69 "33R 0603" FP-CPF0603-MFG 34.041,1.315 r180 top value=33Ω
R70 "33R 0603" FP-CPF0603-MFG 88.716,21.996 r270 top value=33Ω
R71 "33R 0603" FP-CPF0603-MFG 38.769,1.315 r180 top value=33Ω
R73 "33R 0603" FP-CPF0603-MFG 43.034,1.315 r180 top value=33Ω
R74 "33R 0603" FP-CPF0603-MFG 88.166,9.037 r270 top value=33Ω
T1 "HHM22137A2" HHM22137A2 76.7,89.8 r0 top
T2 "HHM22137A2" HHM22137A2 75.6,82.5 r180 top
U1 "RASPBERRY_PI_PICO_2" RASPBERRY_PI_PICO 28.027,14 r90 top
U2 "TPS7A2033PDBVR" FP-DBV0005A-MFG 12.043,67.574 r0 top
U3 "TPS7A2033PDBVR" FP-DBV0005A-MFG 30.704,67.253 r0 top
U4 "TPS7A2033PDBVR" FP-DBV0005A-MFG 68.658,51.325 r90 top
U5 "ADF4351BCPZ" ADI-CP-32-2_N 17.05,85.67 r90 top
U6 "ADF4351BCPZ" ADI-CP-32-2_N 50.55,44.7 r180 top
U7 "GVA-62+" DF782_MNC 36.11,93.798 r0 top
U8 "GVA-62+" DF782_MNC 36.144,83.194 r0 top
U9 "SYM-63LH+" FP-SYM-30DMHW+-MFG 53.289,82.906 r315 top
U10 "SYM-63LH+" FP-SYM-30DMHW+-MFG 65.006,92.226 r0 top
U11 "PCM1808PWR" SOP65P640X120-14N 86.8,30.9 r90 bottom
U12 "TPS7A2045PDBVR" SOT95P280X145-5N 76.634,31.134 r270 top
U13 "OPA2365AIDR" FP-D0008A-MFG 80.608,61.552 r0 bottom
U14 "OPA2365AIDR" FP-D0008A-MFG 88.5,51.6 r0 bottom
U15 "GVA-62+" DF782_MNC 48.867,59.859 r135 top
U16 "TPS7A2033PDBVR" FP-DBV0005A-MFG 66.953,31.163 r270 top
U17 "SI8641BB-B-IS1" SOIC127P600X265-16N 63.7,15.1 r90 top
U18 "SI8641BB-B-IS1" SOIC127P600X265-16N 75.004,15.164 r90 top
U19 "SI8641BB-B-IS1" SOIC127P600X265-16N 86.308,15.196 r90 top
Y1 "ECS-TXO-3225MV-320-TR" OSC_ECS-TXO-3225MV-320-TR 67.6,61.7 r90 top

## Footprints (in the part's own frame and the unit in brackets; to place one, negate y for a bottom-side part, rotate by r counter-clockwise, add the part's x,y. Pads: shape width x height; smd on the part's side, far side on the other; paste and mask are expansions set on the pad)
ADI-CP-32-2_N [mm] "QFN, 32-Leads, Body 5x5mm, Pitch 0.5mm, Thermal Pad 3.1x3.1mm, IPC Medium Density"
  oval 0.9x0.25 smd: 1(-2.45,1.75) 2(-2.45,1.25) 3(-2.45,0.75) 4(-2.45,0.25) 5(-2.45,-0.25) 6(-2.45,-0.75) 7(-2.45,-1.25) 8(-2.45,-1.75) 17(2.45,-1.75) 18(2.45,-1.25) 19(2.45,-0.75) 20(2.45,-0.25) 21(2.45,0.25) 22(2.45,0.75) 23(2.45,1.25) 24(2.45,1.75)
  oval 0.25x0.9 smd: 9(-1.75,-2.45) 10(-1.25,-2.45) 11(-0.75,-2.45) 12(-0.25,-2.45) 13(0.25,-2.45) 14(0.75,-2.45) 15(1.25,-2.45) 16(1.75,-2.45) 25(1.75,2.45) 26(1.25,2.45) 27(0.75,2.45) 28(0.25,2.45) 29(-0.25,2.45) 30(-0.75,2.45) 31(-1.25,2.45) 32(-1.75,2.45)
  rect 3.1x3.1 smd: 33(0,0)
  silkscreen extent -3.47,-2.7 2.7,2.7, body extent -2.55,-2.55 2.55,2.55, height 1
CAPC0603(1608)100_L [mm] "Chip Capacitor, Body 1.6x0.8mm, Height 1.0mm, IPC High Density"
  rect 0.7x0.9 smd: 1(-0.7,0) 2(0.7,0)
  silkscreen extent -0.05,-0.35 0.05,0.35, body extent -0.87,-0.47 0.88,0.48, height 1
CAPC0603(1608)100_N [mm] "Chip Capacitor, Body 1.6x0.8mm, Height 1.0mm, IPC Medium Density"
  rect 0.9x1 smd: 1(-0.8,0) 2(0.8,0)
  silkscreen extent -0.05,-0.4 0.05,0.4, body extent -0.88,-0.48 0.88,0.47, height 1
CAPC1206(3216)190_M [mm] "Chip Capacitor, Body 3.2x1.6mm, Height 1.9mm, IPC Low Density"
  rect 1.35x1.9 smd: 1(-1.6,0) 2(1.6,0)
  silkscreen extent -0.55,-0.85 0.55,0.85, body extent -1.7,-0.9 1.7,0.9, height 1.9
CAPC1608X90X35LL15T15 [mm] "Chip Capacitor, 2-Leads, Body 1.60x0.81mm, IPC High Density"
  rect 0.85x0.9 smd: 1(-0.65,0) 2(0.65,0)
  body extent -0.88,-0.48 0.88,0.48, height 0.9
CAPC1608X92X38LL15T08 [mm] "Chip Capacitor, 2-Leads, Body 1.60x0.80mm, IPC High Density"
  rect 0.75x0.9 smd: 1(-0.625,0) 2(0.625,0)
  body extent -0.87,-0.48 0.87,0.48, height 0.92
CAPC2013X94X50ML20T25 [mm] "Chip Capacitor, 2-Leads, Body 2.01x1.25mm, IPC Low Density"
  rect 1.55x1.55 smd: 1(-0.925,0) 2(0.925,0)
  body extent -1.1,-0.72 1.11,0.72, height 0.94
CAPC2013X145X50NL20T25 [mm] "Chip Capacitor, 2-Leads, Body 2.00x1.25mm, IPC Medium Density"
  rect 1.3x1.45 smd: 1(-0.8,0) 2(0.8,0)
  body extent -1.1,-0.72 1.1,0.72, height 1.45
DF782_MNC [mil]
  rect 19x54.87 smd paste+0 mask+0: 1(-59,-78.44) 3(59,-78.44)
  rect 22x54.87 smd paste+0 mask+0: 2(0,-78.44)
  Top Layer region: 11,-51 -11,-51 -11,-18 -36.98,6.02 -36.98,100.78 36.98,100.78 36.98,6.02 11,-18.98
  silkscreen extent -96,-56 96,56, body extent -91,-98 91,87, height 65
DFN838P1270X560-4N [mm] "DFN, 4-Leads, Body 13.20x12.70mm, Pitch 8.38mm, IPC Medium Density"
  rect 4.55x1.6 smd: 1(-4.19,5.205) 2(-4.19,-5.205) 3(4.19,5.205) 4(4.19,-5.205)
  silkscreen extent -6.4,-6.6 6.35,7.05
FP-5-146256-2-MFG [mm]
  rect 0.76x2.29 smd far side paste+0 mask+0: 1(-1.27,-1.395) 2(-1.27,1.395) 3(1.27,-1.395) 4(1.27,1.395)
  rect 1.39x1.39 hole 0.89 paste-2539.97 mask+0: 1(-1.27,-1.27)
  silkscreen extent -3.31,-2.7 2.59,2.7, body extent -2.69,-2.8 2.69,2.8, height 0.25
FP-32K201-400L5-MFG [mm]
  rect 2.2x2.2 hole 1.6 paste-2539.97 mask+0: 1(0,-4.213)
  round 2.2 hole 1.6 paste-2539.97 mask+0: 2(-2.54,-1.673) 3(2.54,-1.673) 4(-2.54,-6.753) 5(2.54,-6.753)
  silkscreen extent -4.25,-7.59 3.27,7.59, body extent -3.74,-7.95 3.74,7.69, height 0.25
FP-AC0603-IPC_B [mm]
  rect 0.859x0.912 smd paste+0 mask+0: 1(-0.777,0) 2(0.777,0)
  silkscreen extent -1.21,-0.86 1.21,0.86, body extent -1.46,-0.71 1.46,0.71, height 0.25
FP-AISC-0603HP-MFG [mm]
  rect 0.64x1.27 smd paste+0 mask+0: 1(-0.64,0) 2(0.64,0)
  body extent -1.06,-0.73 1.06,0.73, height 0.25
FP-BLM18-0_15-t0_8-IPC_C [mm]
  rect 0.906x0.858 smd paste+0 mask+0: 1(-0.576,0) 2(0.576,0)
  silkscreen extent -1.03,-0.87 1.03,0.87, body extent -1.13,-0.58 1.13,0.58, height 0.25
FP-BLM31-0_2-t1_6-IPC_C [mm]
  rect 1.354x1.706 smd paste+0 mask+0: 1(-1.176,0) 2(1.176,0)
  silkscreen extent -0.2,-0.9 0.2,0.9, body extent -1.95,-1 1.95,1, height 0.25
FP-C0603C-CF-MFG [mm]
  rect 0.75x0.9 smd paste+0 mask+0: 1(-0.6,0) 2(0.6,0)
  silkscreen extent -0.87,-0.85 0.88,0.85, body extent -1.2,-0.6 1.2,0.6, height 0.25
FP-C0805C225K4RACAUTO-MFG [mm]
  rect 0.95x1.35 smd paste+0 mask+0: 1(-0.75,0) 2(0.75,0)
  silkscreen extent -1.15,-1.07 1.15,1.07, body extent -1.4,-0.85 1.4,0.85, height 0.25
FP-CPF0603-MFG [mm]
  rect 1x0.9 smd paste+0 mask+0: 1(-0.9,0) 2(0.9,0)
  silkscreen extent -0.82,-0.82 0.82,0.82, body extent -1.5,-0.55 1.5,0.55, height 0.25
FP-D0008A-MFG [mm]
  rrect17% 1.55x0.6 smd paste+0 mask+0: 1(-2.7,1.905) 2(-2.7,0.635) 3(-2.7,-0.635) 4(-2.7,-1.905) 5(2.7,-1.905) 6(2.7,-0.635) 7(2.7,0.635) 8(2.7,1.905)
  silkscreen extent -4.17,-2.5 1.5,2.5, body extent -3,-2.45 3,2.45, height 1.75
FP-DBV0005A-MFG [mm]
  rrect17% 1.1x0.6 smd paste+0 mask+0: 1(-1.3,0.95) 2(-1.3,0) 3(-1.3,-0.95) 4(1.3,-0.95) 5(1.3,0.95)
  silkscreen extent -2.57,-1.53 0.87,1.53, body extent -1.95,-1.78 1.95,1.78, height 0.25
FP-HCJ0603-MFG [mm]
  rect 1.3x0.92 smd paste+0 mask+0: 1(-0.95,0) 2(0.95,0)
  silkscreen extent -0.9,-0.83 0.9,0.83, body extent -1.7,-0.63 1.7,0.63, height 0.25
FP-LQW2BAN_00-MFG [mm]
  rect 1.02x1.78 smd paste+0 mask+0: 1(-0.89,0) 2(0.89,0)
  silkscreen extent 0,-0.86 0,0.86, body extent -1.5,-0.99 1.5,0.99, height 0.25
FP-MCT0603-IPC_B [mm]
  rect 0.864x0.962 smd paste+0 mask+0: 1(-0.729,0) 2(0.729,0)
  silkscreen extent -1.16,-0.88 1.16,0.88, body extent -1.41,-0.73 1.41,0.73, height 0.25
FP-MCT0603-MFG [mm]
  rect 0.7x0.95 smd paste+0 mask+0: 1(-0.675,0) 2(0.675,0)
  silkscreen extent -0.8,-0.85 0.8,0.85, body extent -0.77,-0.43 0.77,0.43, height 0.55
FP-RT0603-MFG [mm]
  rect 0.9x0.8 smd paste+0 mask+0: 1(-0.85,0) 2(0.85,0)
  silkscreen extent -0.85,-0.81 0.86,0.8, body extent -1.4,-0.55 1.4,0.55, height 0.25
FP-SOD323-CA-MFG [mm]
  rect 0.6x0.6 smd paste-1000 mask+0: 1(-1.1,0) 2(1.1,0)
  silkscreen extent -0.42,-0.68 0.42,0.68, body extent -1.53,-0.82 1.53,0.82, height 0.25
FP-SR0603-MFG [mm]
  rect 0.9x0.8 smd paste+0 mask+0: 1(-0.85,0) 2(0.85,0)
  silkscreen extent -0.03,-0.45 0.03,0.45, body extent -1.4,-0.55 1.4,0.55, height 0.25
FP-SYM-30DMHW+-MFG [mil]
  rect 70x60 smd paste+0 mask+0: 1(235,0) 2(-235,0)
  rect 60x70 smd paste+0 mask+0: 3(0,-172.5) 4(0,172.5) 5(-175,-172.5) 6(175,-172.5)
  silkscreen extent -255,-195 298,195, body extent -274,-211 274,211, height 10
FP-TAJA-MFG [mm]
  rect 1.4x1.8 smd paste+0 mask+0: 1(-1.3,0) 2(1.3,0)
  silkscreen extent -0.23,-0.9 2.9,0.9, body extent -2.1,-1 2.1,1, height 0.25
FP-TFCR0603-IPC_B [mm]
  rect 0.958x0.912 smd paste+0 mask+0: 1(-0.702,0) 2(0.702,0)
  silkscreen extent -1.18,-0.86 1.18,0.86, body extent -1.43,-0.71 1.43,0.71, height 0.25
FP-TFCR0603-MFG [mm]
  rect 1x1 smd paste+0 mask+0: 1(-0.8,0) 2(0.8,0)
  silkscreen extent -0.82,-0.9 0.82,0.9, body extent -0.77,-0.4 0.77,0.4, height 0.55
FP-U_FL-R-SMT-1_80-MFG [mm]
  rect 1x1.05 smd paste-1000 mask+0: 1(0,-1.525)
  rect 1.05x2.2 smd paste-1000 mask+0: 2(-1.475,0) 3(1.475,0)
  silkscreen extent -1.75,-2.82 1.73,1.38, body extent -2.1,-2.15 2.1,1.73, height 0.25
GCT_USB4125-GF-A_REVA2 [mm]
  rect 0.7x1.2 smd: A5(-0.5,3.08) B5(0.5,3.08)
  rect 0.76x1.2 smd: A9(1.52,3.08) B9(-1.52,3.08)
  rect 0.8x1.2 smd: A12(2.75,3.08) B12(-2.75,3.08)
  oval 0.8x1.6 hole 0.6 slot 1.2 at 90 deg mask+0: S1(-4.32,3) S2(4.32,3) S3(-4.32,-0.8) S4(4.32,-0.8)
  Top Layer region: 4.349,3.849 4.377,3.847 4.406,3.843 4.434,3.838 4.462,3.831 4.49,3.823 4.517,3.813 4.544,3.802 4.57,3.79 4.595,3.776 4.62,3.761 4.643,3.745 4.666,3.727 4.688,3.709 4.709,3.689 4.729,3.668 4.747,3.646 4.765,3.623 4.781,3.6 4.796,3.575 4.81,3.55 4.822,3.524 4.833,3.497 4.843,3.47 4.851,3.442 4.858,3.414 4.863,3.386 4.867,3.357 4.869,3.329 4.87,3.3 4.87,2.7 4.869,2.671 4.867,2.643 4.863,2.614 4.858,2.586 4.851,2.558 4.843,2.53 4.833,2.503 4.822,2.476 4.81,2.45 4.796,2.425 4.781,2.4 4.765,2.377 4.747,2.354 4.729,2.332 4.709,2.311 4.688,2.291 4.666,2.273 4.643,2.255 4.62,2.239 4.595,2.224 4.57,2.21 4.544,2.198 4.517,2.187 4.49,2.177 4.462,2.169 4.434,2.162 4.406,2.157 4.377,2.153 4.349,2.151 4.32,2.15 4.291,2.151 4.263,2.153 4.234,2.157 4.206,2.162 4.178,2.169 4.15,2.177 4.123,2.187 4.096,2.198 4.07,2.21 4.045,2.224 4.02,2.239 3.997,2.255 3.974,2.273 3.952,2.291 3.931,2.311 3.911,2.332 3.893,2.354 3.875,2.377 3.859,2.4 3.844,2.425 3.83,2.45 3.818,2.476 3.807,2.503 3.797,2.53 3.789,2.558 3.782,2.586 3.777,2.614 3.773,2.643 3.771,2.671 3.77,2.7 3.77,3.3 3.771,3.329 3.773,3.357 3.777,3.386 3.782,3.414 3.789,3.442 3.797,3.47 3.807,3.497 3.818,3.524 3.83,3.55 3.844,3.575 3.859,3.6 3.875,3.623 3.893,3.646 3.911,3.668 3.931,3.689 3.952,3.709 3.974,3.727 3.997,3.745 4.02,3.761 4.045,3.776 4.07,3.79 4.096,3.802 4.123,3.813 4.15,3.823 4.178,3.831 4.206,3.838 4.234,3.843 4.263,3.847 4.291,3.849 4.32,3.85
  Top Layer region: -4.291,3.849 -4.263,3.847 -4.234,3.843 -4.206,3.838 -4.178,3.831 -4.15,3.823 -4.123,3.813 -4.096,3.802 -4.07,3.79 -4.045,3.776 -4.02,3.761 -3.997,3.745 -3.974,3.727 -3.952,3.709 -3.931,3.689 -3.911,3.668 -3.893,3.646 -3.875,3.623 -3.859,3.6 -3.844,3.575 -3.83,3.55 -3.818,3.524 -3.807,3.497 -3.797,3.47 -3.789,3.442 -3.782,3.414 -3.777,3.386 -3.773,3.357 -3.771,3.329 -3.77,3.3 -3.77,2.7 -3.771,2.671 -3.773,2.643 -3.777,2.614 -3.782,2.586 -3.789,2.558 -3.797,2.53 -3.807,2.503 -3.818,2.476 -3.83,2.45 -3.844,2.425 -3.859,2.4 -3.875,2.377 -3.893,2.354 -3.911,2.332 -3.931,2.311 -3.952,2.291 -3.974,2.273 -3.997,2.255 -4.02,2.239 -4.045,2.224 -4.07,2.21 -4.096,2.198 -4.123,2.187 -4.15,2.177 -4.178,2.169 -4.206,2.162 -4.234,2.157 -4.263,2.153 -4.291,2.151 -4.32,2.15 -4.349,2.151 -4.377,2.153 -4.406,2.157 -4.434,2.162 -4.462,2.169 -4.49,2.177 -4.517,2.187 -4.544,2.198 -4.57,2.21 -4.595,2.224 -4.62,2.239 -4.643,2.255 -4.666,2.273 -4.688,2.291 -4.709,2.311 -4.729,2.332 -4.747,2.354 -4.765,2.377 -4.781,2.4 -4.796,2.425 -4.81,2.45 -4.822,2.476 -4.833,2.503 -4.843,2.53 -4.851,2.558 -4.858,2.586 -4.863,2.614 -4.867,2.643 -4.869,2.671 -4.87,2.7 -4.87,3.3 -4.869,3.329 -4.867,3.357 -4.863,3.386 -4.858,3.414 -4.851,3.442 -4.843,3.47 -4.833,3.497 -4.822,3.524 -4.81,3.55 -4.796,3.575 -4.781,3.6 -4.765,3.623 -4.747,3.646 -4.729,3.668 -4.709,3.689 -4.688,3.709 -4.666,3.727 -4.643,3.745 -4.62,3.761 -4.595,3.776 -4.57,3.79 -4.544,3.802 -4.517,3.813 -4.49,3.823 -4.462,3.831 -4.434,3.838 -4.406,3.843 -4.377,3.847 -4.349,3.849 -4.32,3.85
  Top Layer region: 4.349,0.049 4.377,0.047 4.406,0.043 4.434,0.038 4.462,0.031 4.49,0.023 4.517,0.013 4.544,0.002 4.57,-0.01 4.595,-0.024 4.62,-0.039 4.643,-0.055 4.666,-0.073 4.688,-0.091 4.709,-0.111 4.729,-0.132 4.747,-0.154 4.765,-0.177 4.781,-0.2 4.796,-0.225 4.81,-0.25 4.822,-0.276 4.833,-0.303 4.843,-0.33 4.851,-0.358 4.858,-0.386 4.863,-0.414 4.867,-0.443 4.869,-0.471 4.87,-0.5 4.87,-1.1 4.869,-1.129 4.867,-1.157 4.863,-1.186 4.858,-1.214 4.851,-1.242 4.843,-1.27 4.833,-1.297 4.822,-1.324 4.81,-1.35 4.796,-1.375 4.781,-1.4 4.765,-1.423 4.747,-1.446 4.729,-1.468 4.709,-1.489 4.688,-1.509 4.666,-1.527 4.643,-1.545 4.62,-1.561 4.595,-1.576 4.57,-1.59 4.544,-1.602 4.517,-1.613 4.49,-1.623 4.462,-1.631 4.434,-1.638 4.406,-1.643 4.377,-1.647 4.349,-1.649 4.32,-1.65 4.291,-1.649 4.263,-1.647 4.234,-1.643 4.206,-1.638 4.178,-1.631 4.15,-1.623 4.123,-1.613 4.096,-1.602 4.07,-1.59 4.045,-1.576 4.02,-1.561 3.997,-1.545 3.974,-1.527 3.952,-1.509 3.931,-1.489 3.911,-1.468 3.893,-1.446 3.875,-1.423 3.859,-1.4 3.844,-1.375 3.83,-1.35 3.818,-1.324 3.807,-1.297 3.797,-1.27 3.789,-1.242 3.782,-1.214 3.777,-1.186 3.773,-1.157 3.771,-1.129 3.77,-1.1 3.77,-0.5 3.771,-0.471 3.773,-0.443 3.777,-0.414 3.782,-0.386 3.789,-0.358 3.797,-0.33 3.807,-0.303 3.818,-0.276 3.83,-0.25 3.844,-0.225 3.859,-0.2 3.875,-0.177 3.893,-0.154 3.911,-0.132 3.931,-0.111 3.952,-0.091 3.974,-0.073 3.997,-0.055 4.02,-0.039 4.045,-0.024 4.07,-0.01 4.096,0.002 4.123,0.013 4.15,0.023 4.178,0.031 4.206,0.038 4.234,0.043 4.263,0.047 4.291,0.049 4.32,0.05
  Top Layer region: -4.291,0.049 -4.263,0.047 -4.234,0.043 -4.206,0.038 -4.178,0.031 -4.15,0.023 -4.123,0.013 -4.096,0.002 -4.07,-0.01 -4.045,-0.024 -4.02,-0.039 -3.997,-0.055 -3.974,-0.073 -3.952,-0.091 -3.931,-0.111 -3.911,-0.132 -3.893,-0.154 -3.875,-0.177 -3.859,-0.2 -3.844,-0.225 -3.83,-0.25 -3.818,-0.276 -3.807,-0.303 -3.797,-0.33 -3.789,-0.358 -3.782,-0.386 -3.777,-0.414 -3.773,-0.443 -3.771,-0.471 -3.77,-0.5 -3.77,-1.1 -3.771,-1.129 -3.773,-1.157 -3.777,-1.186 -3.782,-1.214 -3.789,-1.242 -3.797,-1.27 -3.807,-1.297 -3.818,-1.324 -3.83,-1.35 -3.844,-1.375 -3.859,-1.4 -3.875,-1.423 -3.893,-1.446 -3.911,-1.468 -3.931,-1.489 -3.952,-1.509 -3.974,-1.527 -3.997,-1.545 -4.02,-1.561 -4.045,-1.576 -4.07,-1.59 -4.096,-1.602 -4.123,-1.613 -4.15,-1.623 -4.178,-1.631 -4.206,-1.638 -4.234,-1.643 -4.263,-1.647 -4.291,-1.649 -4.32,-1.65 -4.349,-1.649 -4.377,-1.647 -4.406,-1.643 -4.434,-1.638 -4.462,-1.631 -4.49,-1.623 -4.517,-1.613 -4.544,-1.602 -4.57,-1.59 -4.595,-1.576 -4.62,-1.561 -4.643,-1.545 -4.666,-1.527 -4.688,-1.509 -4.709,-1.489 -4.729,-1.468 -4.747,-1.446 -4.765,-1.423 -4.781,-1.4 -4.796,-1.375 -4.81,-1.35 -4.822,-1.324 -4.833,-1.297 -4.843,-1.27 -4.851,-1.242 -4.858,-1.214 -4.863,-1.186 -4.867,-1.157 -4.869,-1.129 -4.87,-1.1 -4.87,-0.5 -4.869,-0.471 -4.867,-0.443 -4.863,-0.414 -4.858,-0.386 -4.851,-0.358 -4.843,-0.33 -4.833,-0.303 -4.822,-0.276 -4.81,-0.25 -4.796,-0.225 -4.781,-0.2 -4.765,-0.177 -4.747,-0.154 -4.729,-0.132 -4.709,-0.111 -4.688,-0.091 -4.666,-0.073 -4.643,-0.055 -4.62,-0.039 -4.595,-0.024 -4.57,-0.01 -4.544,0.002 -4.517,0.013 -4.49,0.023 -4.462,0.031 -4.434,0.038 -4.406,0.043 -4.377,0.047 -4.349,0.049 -4.32,0.05
  Bottom Layer region: 4.349,3.849 4.377,3.847 4.406,3.843 4.434,3.838 4.462,3.831 4.49,3.823 4.517,3.813 4.544,3.802 4.57,3.79 4.595,3.776 4.62,3.761 4.643,3.745 4.666,3.727 4.688,3.709 4.709,3.689 4.729,3.668 4.747,3.646 4.765,3.623 4.781,3.6 4.796,3.575 4.81,3.55 4.822,3.524 4.833,3.497 4.843,3.47 4.851,3.442 4.858,3.414 4.863,3.386 4.867,3.357 4.869,3.329 4.87,3.3 4.87,2.7 4.869,2.671 4.867,2.643 4.863,2.614 4.858,2.586 4.851,2.558 4.843,2.53 4.833,2.503 4.822,2.476 4.81,2.45 4.796,2.425 4.781,2.4 4.765,2.377 4.747,2.354 4.729,2.332 4.709,2.311 4.688,2.291 4.666,2.273 4.643,2.255 4.62,2.239 4.595,2.224 4.57,2.21 4.544,2.198 4.517,2.187 4.49,2.177 4.462,2.169 4.434,2.162 4.406,2.157 4.377,2.153 4.349,2.151 4.32,2.15 4.291,2.151 4.263,2.153 4.234,2.157 4.206,2.162 4.178,2.169 4.15,2.177 4.123,2.187 4.096,2.198 4.07,2.21 4.045,2.224 4.02,2.239 3.997,2.255 3.974,2.273 3.952,2.291 3.931,2.311 3.911,2.332 3.893,2.354 3.875,2.377 3.859,2.4 3.844,2.425 3.83,2.45 3.818,2.476 3.807,2.503 3.797,2.53 3.789,2.558 3.782,2.586 3.777,2.614 3.773,2.643 3.771,2.671 3.77,2.7 3.77,3.3 3.771,3.329 3.773,3.357 3.777,3.386 3.782,3.414 3.789,3.442 3.797,3.47 3.807,3.497 3.818,3.524 3.83,3.55 3.844,3.575 3.859,3.6 3.875,3.623 3.893,3.646 3.911,3.668 3.931,3.689 3.952,3.709 3.974,3.727 3.997,3.745 4.02,3.761 4.045,3.776 4.07,3.79 4.096,3.802 4.123,3.813 4.15,3.823 4.178,3.831 4.206,3.838 4.234,3.843 4.263,3.847 4.291,3.849 4.32,3.85
  Bottom Layer region: -4.291,3.849 -4.263,3.847 -4.234,3.843 -4.206,3.838 -4.178,3.831 -4.15,3.823 -4.123,3.813 -4.096,3.802 -4.07,3.79 -4.045,3.776 -4.02,3.761 -3.997,3.745 -3.974,3.727 -3.952,3.709 -3.931,3.689 -3.911,3.668 -3.893,3.646 -3.875,3.623 -3.859,3.6 -3.844,3.575 -3.83,3.55 -3.818,3.524 -3.807,3.497 -3.797,3.47 -3.789,3.442 -3.782,3.414 -3.777,3.386 -3.773,3.357 -3.771,3.329 -3.77,3.3 -3.77,2.7 -3.771,2.671 -3.773,2.643 -3.777,2.614 -3.782,2.586 -3.789,2.558 -3.797,2.53 -3.807,2.503 -3.818,2.476 -3.83,2.45 -3.844,2.425 -3.859,2.4 -3.875,2.377 -3.893,2.354 -3.911,2.332 -3.931,2.311 -3.952,2.291 -3.974,2.273 -3.997,2.255 -4.02,2.239 -4.045,2.224 -4.07,2.21 -4.096,2.198 -4.123,2.187 -4.15,2.177 -4.178,2.169 -4.206,2.162 -4.234,2.157 -4.263,2.153 -4.291,2.151 -4.32,2.15 -4.349,2.151 -4.377,2.153 -4.406,2.157 -4.434,2.162 -4.462,2.169 -4.49,2.177 -4.517,2.187 -4.544,2.198 -4.57,2.21 -4.595,2.224 -4.62,2.239 -4.643,2.255 -4.666,2.273 -4.688,2.291 -4.709,2.311 -4.729,2.332 -4.747,2.354 -4.765,2.377 -4.781,2.4 -4.796,2.425 -4.81,2.45 -4.822,2.476 -4.833,2.503 -4.843,2.53 -4.851,2.558 -4.858,2.586 -4.863,2.614 -4.867,2.643 -4.869,2.671 -4.87,2.7 -4.87,3.3 -4.869,3.329 -4.867,3.357 -4.863,3.386 -4.858,3.414 -4.851,3.442 -4.843,3.47 -4.833,3.497 -4.822,3.524 -4.81,3.55 -4.796,3.575 -4.781,3.6 -4.765,3.623 -4.747,3.646 -4.729,3.668 -4.709,3.689 -4.688,3.709 -4.666,3.727 -4.643,3.745 -4.62,3.761 -4.595,3.776 -4.57,3.79 -4.544,3.802 -4.517,3.813 -4.49,3.823 -4.462,3.831 -4.434,3.838 -4.406,3.843 -4.377,3.847 -4.349,3.849 -4.32,3.85
  Bottom Layer region: 4.349,0.049 4.377,0.047 4.406,0.043 4.434,0.038 4.462,0.031 4.49,0.023 4.517,0.013 4.544,0.002 4.57,-0.01 4.595,-0.024 4.62,-0.039 4.643,-0.055 4.666,-0.073 4.688,-0.091 4.709,-0.111 4.729,-0.132 4.747,-0.154 4.765,-0.177 4.781,-0.2 4.796,-0.225 4.81,-0.25 4.822,-0.276 4.833,-0.303 4.843,-0.33 4.851,-0.358 4.858,-0.386 4.863,-0.414 4.867,-0.443 4.869,-0.471 4.87,-0.5 4.87,-1.1 4.869,-1.129 4.867,-1.157 4.863,-1.186 4.858,-1.214 4.851,-1.242 4.843,-1.27 4.833,-1.297 4.822,-1.324 4.81,-1.35 4.796,-1.375 4.781,-1.4 4.765,-1.423 4.747,-1.446 4.729,-1.468 4.709,-1.489 4.688,-1.509 4.666,-1.527 4.643,-1.545 4.62,-1.561 4.595,-1.576 4.57,-1.59 4.544,-1.602 4.517,-1.613 4.49,-1.623 4.462,-1.631 4.434,-1.638 4.406,-1.643 4.377,-1.647 4.349,-1.649 4.32,-1.65 4.291,-1.649 4.263,-1.647 4.234,-1.643 4.206,-1.638 4.178,-1.631 4.15,-1.623 4.123,-1.613 4.096,-1.602 4.07,-1.59 4.045,-1.576 4.02,-1.561 3.997,-1.545 3.974,-1.527 3.952,-1.509 3.931,-1.489 3.911,-1.468 3.893,-1.446 3.875,-1.423 3.859,-1.4 3.844,-1.375 3.83,-1.35 3.818,-1.324 3.807,-1.297 3.797,-1.27 3.789,-1.242 3.782,-1.214 3.777,-1.186 3.773,-1.157 3.771,-1.129 3.77,-1.1 3.77,-0.5 3.771,-0.471 3.773,-0.443 3.777,-0.414 3.782,-0.386 3.789,-0.358 3.797,-0.33 3.807,-0.303 3.818,-0.276 3.83,-0.25 3.844,-0.225 3.859,-0.2 3.875,-0.177 3.893,-0.154 3.911,-0.132 3.931,-0.111 3.952,-0.091 3.974,-0.073 3.997,-0.055 4.02,-0.039 4.045,-0.024 4.07,-0.01 4.096,0.002 4.123,0.013 4.15,0.023 4.178,0.031 4.206,0.038 4.234,0.043 4.263,0.047 4.291,0.049 4.32,0.05
  Bottom Layer region: -4.291,0.049 -4.263,0.047 -4.234,0.043 -4.206,0.038 -4.178,0.031 -4.15,0.023 -4.123,0.013 -4.096,0.002 -4.07,-0.01 -4.045,-0.024 -4.02,-0.039 -3.997,-0.055 -3.974,-0.073 -3.952,-0.091 -3.931,-0.111 -3.911,-0.132 -3.893,-0.154 -3.875,-0.177 -3.859,-0.2 -3.844,-0.225 -3.83,-0.25 -3.818,-0.276 -3.807,-0.303 -3.797,-0.33 -3.789,-0.358 -3.782,-0.386 -3.777,-0.414 -3.773,-0.443 -3.771,-0.471 -3.77,-0.5 -3.77,-1.1 -3.771,-1.129 -3.773,-1.157 -3.777,-1.186 -3.782,-1.214 -3.789,-1.242 -3.797,-1.27 -3.807,-1.297 -3.818,-1.324 -3.83,-1.35 -3.844,-1.375 -3.859,-1.4 -3.875,-1.423 -3.893,-1.446 -3.911,-1.468 -3.931,-1.489 -3.952,-1.509 -3.974,-1.527 -3.997,-1.545 -4.02,-1.561 -4.045,-1.576 -4.07,-1.59 -4.096,-1.602 -4.123,-1.613 -4.15,-1.623 -4.178,-1.631 -4.206,-1.638 -4.234,-1.643 -4.263,-1.647 -4.291,-1.649 -4.32,-1.65 -4.349,-1.649 -4.377,-1.647 -4.406,-1.643 -4.434,-1.638 -4.462,-1.631 -4.49,-1.623 -4.517,-1.613 -4.544,-1.602 -4.57,-1.59 -4.595,-1.576 -4.62,-1.561 -4.643,-1.545 -4.666,-1.527 -4.688,-1.509 -4.709,-1.489 -4.729,-1.468 -4.747,-1.446 -4.765,-1.423 -4.781,-1.4 -4.796,-1.375 -4.81,-1.35 -4.822,-1.324 -4.833,-1.297 -4.843,-1.27 -4.851,-1.242 -4.858,-1.214 -4.863,-1.186 -4.867,-1.157 -4.869,-1.129 -4.87,-1.1 -4.87,-0.5 -4.869,-0.471 -4.867,-0.443 -4.863,-0.414 -4.858,-0.386 -4.851,-0.358 -4.843,-0.33 -4.833,-0.303 -4.822,-0.276 -4.81,-0.25 -4.796,-0.225 -4.781,-0.2 -4.765,-0.177 -4.747,-0.154 -4.729,-0.132 -4.709,-0.111 -4.688,-0.091 -4.666,-0.073 -4.643,-0.055 -4.62,-0.039 -4.595,-0.024 -4.57,-0.01 -4.544,0.002 -4.517,0.013 -4.49,0.023 -4.462,0.031 -4.434,0.038 -4.406,0.043 -4.377,0.047 -4.349,0.049 -4.32,0.05
  silkscreen extent -4.47,-3.4 4.47,-2.25
HHM22137A2 [mm]
  rect 0.3x0.5 smd paste+0 mask+0.05: 1(-0.55,-0.5) 2(0,-0.5) 3(0.55,-0.5) 4(0.55,0.5) 5(0,0.5) 6(-0.55,0.5)
OSC_ECS-TXO-3225MV-320-TR [mm]
  rect 1.5x1.1 smd paste+0 mask+0.102: 1(-1.15,-0.95) 2(1.15,-0.95) 3(1.15,0.95) 4(-1.15,0.95)
  silkscreen extent -2.37,-1.09 -2.18,-0.89, body extent -1.6,-1.25 1.6,1.25, height 1.2
RASPBERRY_PI_PICO [mm]
  rect 1.508x1.508 / inner round 1.508 / far side rect 1.508x1.508 hole 1: 3V3(8.89,12.7) 3V3_EN(8.89,15.24) ADC_VREF(8.89,10.16) AGND(8.89,5.08) GND(8.89,17.78) GND2(8.89,-7.62) GND3(8.89,-20.32) GND4(-8.89,17.78) GND5(-8.89,5.08) GND6(-8.89,-7.62) GND7(-8.89,-20.32) GP0(-8.89,22.86) GP1(-8.89,20.32) GP2(-8.89,15.24) GP3(-8.89,12.7) GP4(-8.89,10.16) GP5(-8.89,7.62) GP6(-8.89,2.54) GP7(-8.89,0) GP8(-8.89,-2.54) GP9(-8.89,-5.08) GP10(-8.89,-10.16) GP11(-8.89,-12.7) GP12(-8.89,-15.24) GP13(-8.89,-17.78) GP14(-8.89,-22.86) GP15(-8.89,-25.4) GP16(8.89,-25.4) GP17(8.89,-22.86) GP18(8.89,-17.78) GP19(8.89,-15.24) GP20(8.89,-12.7) GP21(8.89,-10.16) GP22(8.89,-5.08) GP26_A0(8.89,0) GP27_A1(8.89,2.54) GP28_A2(8.89,7.62) RUN(8.89,-2.54) VBUS(8.89,22.86) VSYS(8.89,20.32)
  silkscreen extent -11.43,-27.94 11.43,27.94, body extent -10.5,-25.5 10.5,26.8, height 3.73
SOIC127P600X265-16N [mm]
  rrect15% 1.9x0.6 smd: 1(-2.46,4.445) 2(-2.46,3.175) 3(-2.46,1.905) 4(-2.46,0.635) 5(-2.46,-0.635) 6(-2.46,-1.905) 7(-2.46,-3.175) 8(-2.46,-4.445) 9(2.46,-4.445) 10(2.46,-3.175) 11(2.46,-1.905) 12(2.46,-0.635) 13(2.46,0.635) 14(2.46,1.905) 15(2.46,3.175) 16(2.46,4.445)
  silkscreen extent -4.2,-5.15 1.61,5.15, body extent -3,-4.95 3,4.95, height 1.75
SOP65P640X120-14N [mm]
  rrect25% 1.57x0.41 smd: 1(-2.87,1.95) 2(-2.87,1.3) 3(-2.87,0.65) 4(-2.87,0) 5(-2.87,-0.65) 6(-2.87,-1.3) 7(-2.87,-1.95) 8(2.87,-1.95) 9(2.87,-1.3) 10(2.87,-0.65) 11(2.87,0) 12(2.87,0.65) 13(2.87,1.3) 14(2.87,1.95)
  silkscreen extent -4.34,-2.5 2.2,2.5, body extent -3.2,-2.5 3.2,2.5, height 1.2
SOT95P280X145-5N [mm]
  rrect15% 1.21x0.59 smd paste+0 mask+0.102: 1(-1.255,0.95) 2(-1.255,0) 3(-1.255,-0.95) 4(1.255,-0.95) 5(1.255,0.95)
  silkscreen extent -2.68,-1.45 0.8,1.45
WL-SMCW_1206_150120xx75000 [mm] "SMD Mono-color Chip LED, body 3.2x1.6mm"
  rect 1.4x1.6 smd: 1(-1.5,0) 2(1.5,0)
  silkscreen extent -2.6,-0.75 -2.4,0.75, body extent -1.6,-0.8 1.6,0.8, height 0.68

## Part data
C1 C12 C13 C18 C21 C23 C24 C29 C30 C31 C35 C36 C41 C44 C51 C53 C56 C59 C61 C62 C75 C77 C79 C80 C81: library part CMP-1035-02589-1, "CAP 100nF 25V ±20% 0603 (1608 Metric) Thickness 1mm SMD", Case-EIA=0603, Case-Metric=1608, Rated Voltage="25 V", Tolerance=Â±20%, Max Thickness="1 mm", Technology=SMT
C2 C8 C10 C73: library part CMP-2007-03267-2, "CAP CER 2.2UF 16V X7R 0805", Capacitance=2.2uF, Case Code (Imperial)=0805, Case Code (Metric)=2012, Dielectric=X7R, Dielectric Material=Ceramic, Max Operating Temperature=125°C, Min Operating Temperature=-55°C, Package Quantity=1, Ratings=AEC-Q200, Tolerance=10%, Voltage Rating=16V, Case/Package=0805, Construction=Flat, Contact Plating=Tin, Depth=1.25mm, Height=1.25mm, Length=0.079inch, Mount="Surface Mount", Packaging="Cut Tape", Radiation Hardening=No, REACH SVHC="No SVHC", RoHS Compliant=Yes, Series=C, Thickness=0.055inch, Voltage Rating (DC)=16V, Width=0.049inch
C3 C9 C11 C52 C57 C58 C74: library part CMP-2007-01121-1, Manufacturer=Kemet, Part Number=C0805C105J3RACTU
C4 C19: library part CMP-2007-04453-1, Manufacturer="AVX Interconnect / Elco", Part Number=0805YC103MAT2A
C5 C6: library part CMP-1661-00004-2, "10uF 16V  ±10% 3Ω 1206  SMD Tantalum Capacitor / TAJA106K016RNJ", Capacitance=10uF, Case Code (Imperial)=1206, Case Code (Metric)=3216, Dielectric Material=Tantalum, ESR (Equivalent Series Resistance)=3R, Leakage Current=1.6uA, Max Operating Temperature=125°C, Min Operating Temperature=-55°C, Package Quantity=1, Tolerance=10%, Voltage=16V, Case/Package=1206, Depth=1.6mm, Dissipation Factor=8%, Features="General Purpose", Height=1.6mm, Height - Seated (Max)=0.071inch, Lead Free="Lead Free", Lead Pitch=1.1mm, Length=3.2mm, Mount="Surface Mount", Number of Pins=2, Packaging="Tape and Reel", Polarity=Polar, Radiation Hardening=No, REACH SVHC="No SVHC", Termination=SMD/SMT, Voltage Rating=16V, Voltage Rating (DC)=16V, Width=1.6mm
C7: library part CMP-1035-02589-1, "CAP 10nF 25V ±20% 0603 (1608 Metric) Thickness 1mm SMD", Case-EIA=0603, Case-Metric=1608, Rated Voltage="25 V", Tolerance=Â±20%, Max Thickness="1 mm", Technology=SMT
C14 C15 C20 C28 C40 C42 C43 C45 C48 C49 C55 C71 C72 C82 C83 C84: library part CMP-2006-01182-1, Manufacturer=Vitramon, Part Number=VJ0603A101FXAAC
C16 C32 C68 C70: library part CMP-03020-009150-1, "CAP CER 1800PF 25V X7R 0603", Capacitance="1,800 pF", Manufacturer=KEMET, Manufacturer Part Number=C0603C182J3RACTU, Package=C0603C-CF, Temperature="-55°C to +125°C", Temperature Characteristic=X7R, Temperature Coefficient=30ppm/°C, Temperature Range High=+125°C, Temperature Range Low=-55°C, Tolerance=0.05, Voltage Rating="25 V", Automotive=Yes, Automotive Grade="Grade 1", Category=Cap, ComponentLink2Description=Datasheet, ComponentLink2URL=https://api.kemet.com/component-edge/download/datasheet/C0603C100J5GACAUTO.pdf, Device Class L1="Passive Components", Device Class L2=Capacitors, Device Class L3="Ceramic Capacitors", Digikey Description="CAP CER 1800PF 25V X7R 0603", Height=0.87mm, Lead Free=Yes, Material=Ceramic, Octopart=https://octopart.com/c0603c182j3ractu-kemet-17061586, RoHS=TRUE
C17 C33: library part CMP-2006-01334-1, Manufacturer=Vitramon, Part Number=VJ0603A271KXAAC
C22 C25 C34 C37 C50 C54 C60 C63 C64 C65 C66 C67 C69: library part CMP-1037-04973-1, "CAP 10uF 16V ±5% 1206 (3216 Metric) Thickness 1.9mm SMD", Case-EIA=1206, Case-Metric=3216, Rated Voltage="16 V", Tolerance=Â±5%, Max Thickness="1.9 mm", Technology=SMT
C26 C27 C38 C39 C76 C78: library part CMP-1035-00228-1, "CAP 100nF 16V ±0.1pF 0603 (1608 Metric) Thickness 1mm SMD", Case-EIA=0603, Case-Metric=1608, Rated Voltage="16 V", Tolerance=Â±0.1pF, Max Thickness="1 mm", Technology=SMT
C46 C47: library part CMP-2006-04522-1, Manufacturer="AVX Interconnect / Elco", Part Number=0603YC563JAT2A
CMC1: "CHOKE COMMON MODE 1125UH 1.8A SMD"
D2: library part CMP-14432-000001-1, "TVS DIODE 5V 14V SOD323"
DS1: library part CMP-1426-00016-4, "Led, Green, 570 Nm, 2 V, 30 Ma, 40 Mcd Rohs Compliant: Yes", Case Code (Imperial)=1206, Case Code (Metric)=3216, Color=Green, Forward Current=100mA, Forward Voltage=2V, Manufacturer Lifecycle Status=ACTIVE, Max Operating Temperature=85°C, Max Reverse Voltage (DC)=5V, Min Operating Temperature=-40°C, Test Current=20mA, Case/Package=1206, Dominant Wavelength=570nm, Height=680µm, Length=3.2mm, Lens Style="Clear, Rectangular", Lifecycle Status=Production, Luminous Intensity=40mcd, Mount="Surface Mount", Packaging="Tape and Reel", Peak Wavelength=572nm, REACH SVHC=Unknown, RoHS=Compliant, Viewing Angle=140°, Wavelength=570nm, Width=1.6mm, YEOL="1 = Estimated lifetime > 10 years"
FB1 FB2 FB3 FB4 FB5 FB8: library part CMP-06046-002145-1, "Chip Ferrite Bead, 1206, 1kΩ @ 100MHz, max. 0.200Ω, 25%, 2A", Case Code (Imperial)=1206, Case Code (Metric)=3216, DC Resistance (DCR)=200mR, Max Current Rating=2A, Max Operating Temperature=125°C, Min Operating Temperature=-55°C, Ratings=AEC-Q200, Case/Package=1206, Mount="Surface Mount", Number of Lines=1, Packaging="Tape and Reel", RoHS Compliant=Yes
FB6 FB7: library part CMP-0686-00368-3, "Chip Ferrite Bead, 0603, 1500Ω @ 100MHz, 0.5Ω, 25%, 500mA", Case Code (Imperial)=0603, Case Code (Metric)=1608, Current Rating=500mA, DC Resistance (DCR)=500mR, Max Operating Temperature=125°C, Min Operating Temperature=-55°C, Package Quantity=1, Test Frequency=100MHz, Tolerance=25%, Case/Package=0603, Core Material=Ferrite, DC Current=500mA, Depth=0.8mm, Height=0.8mm, Impedance=1.5kR, Lead Free="Lead Free", Length=1.6mm, Material=Ferrite, Max Current Rating=500mA, Max DC Current=500mA, Military Standard=Not, Number of Circuits=1, Number of Lines=1, Number of Pins=2, Packaging="Tape and Reel", Radiation Hardening=No, REACH SVHC="No SVHC", Termination=SMD/SMT, Width=0.8mm
J1: library part CMP-0751-00005-2, "CONN SMA JACK R/A 50OHM PCB", Case/Package=SMA, Dielectric Material=PTFE, Housing Color=Gold, Max Frequency=18GHz, Max Operating Temperature=165°C, Min Operating Temperature=-65°C, Voltage Rating=480V, Body Material=Brass, Body Plating=Gold, Center Contact Plating=Gold, Connector Type=SMA, Contact Material=Copper, Contact Plating=Gold, Fastening Type=Threaded, Gender=Female, Impedance=50R, Mating Cycles=500, Number of Ports=1, Packaging=Bulk, RoHS Compliant=Yes, Series=-, Termination=Solder
J2: library part CMP-039-000000-1, Package=None, Availability=Unavailable, Component Type=Standard, Design Item ID=USB4125-GF-A_REVA2, MP=USB4125-GF-A_REVA2, Pin Count=10, Price=None, Source=USB4125-GF-A_REVA2.SchLib
J3: library part CMP-03369-000128-1, "CONN HEADER VERT 4POS 2.54MM", Color=Black, Contact Current Rating=3A, Flammability Rating="UL94 V-0", High Temperature Housing=Yes, Insulation Resistance=5GR, Max Operating Temperature=105°C, Min Operating Temperature=-65°C, Package Quantity=500, Voltage Rating=750V, Approvals=CSA, Board Standoff="Yes (With)", Connector Type=Plug, Contact Gender=Male, Contact Material=Bronze, Contact Mating Length=0.23inch, Contact Plating=Gold, Contact Post Length=0.12inch, Contact Protection="No (Without)", Contact Shape=Square, Contact Type="Male Pin", Current Rating=3A, Depth=4.88mm, Gasket="No (Without)", High Speed Serial Data Connector=No, Housing Color=Black, Housing Material=Thermoplastic, Keyed=No, Length=4.67mm, Mating Alignment="No (Without)", Mating Connector Lock="No (Without)", Mount="Through Hole", Number Of Contacts=4, Number of Positions=4, Number of Rows=2, Orientation=Straight, Packaging=Carton, PCB Mount Retention=Without, PCB Mounting Orientation=Vertical, PCB Thickness=0.062inch, Pitch=2.54mm, Radiation Hardening=No, RoHS Compliant=Yes, Row Spacing=2.54mm, Selectively Loaded="No (Without)", Series="AMPMODU MOD II", Stabilizers="No (Without)", Strain Relief="No (Without)", Termination="Through Hole"
J4 J5: library part CMP-11598-000004-1, "CONN U.FL RCPT STR 50 OHM SMD", Case/Package=SMD/SMT, Dielectric Material=Polymer, Housing Color=Beige, Max Frequency=6GHz, Max Operating Temperature=90°C, Min Operating Temperature=-40°C, Package Quantity=10000, Body Material=Bronze, Body Plating=Silver, Center Contact Plating=Gold, Connector Type=Receptacle, Contact Material=Brass, Fastening Type=SNAP-ON, Impedance=50R, Lead Free="Lead Free", Mating Cycles=30, Mount="Surface Mount", Number of Ports=1, Packaging="Tape and Reel", RoHS Compliant=Yes, Series=U.FL, Termination=Solder
L1 L2 L3 L4: library part CMP-27750-000002-1, Case Code (Imperial)=0603, Case Code (Metric)=1608, Package Quantity=1, Case/Package=0603, Height=1.02mm, Height - Seated (Max)=0.04inch, Length=0.071inch, Mount="Surface Mount", Packaging="Tape and Reel", RoHS Compliant=Yes, Termination=SMD/SMT, Width=1.12mm
L5 L6 L7: library part CMP-06042-010439-1, "18 nH Unshielded Drum Core, Wirewound Inductor 800 mA 130mOhm 0805 (2012 Metric) / 0805CT-180EGTS", Case Code (Imperial)=0806, Case Code (Metric)=2015, Case/Package=0805, Current Rating=600mA, DC Resistance (DCR)=130mR, Inductance=18nH, Max DC Current=800mA, Max Operating Temperature=125°C, Min Operating Temperature=-55°C, Package Quantity=2000, Resistor Type=Wirewound, Self Resonant Frequency=3.1GHz, Test Frequency=250MHz, Tolerance=5%, Core Material=Air, DC Current=600mA, Depth=1.73mm, Height=1.42mm, Height - Seated (Max)=0.06inch, Length=0.082inch, Military Standard=Not, Mount="Surface Mount", Packaging="Tape and Reel", Q Factor=50, Radiation Hardening=No, Shielding=Unshielded, Termination=SMD/SMT, Weight=0.000494oz, Width=1.5mm
R1 R2: library part CMP-02407-010205-1, "RES SMD 100 OHM 1% 1/8W 0603", Case/Package=0603, Max Operating Temperature=125°C, Min Operating Temperature=-55°C, Resistance=5.1kR, Temperature Coefficient=25ppm/°C, Tolerance=0.1%, Composition="Thin Film", Contact Plating=Tin, Height=450um, Lead Free="Lead Free", Length=1.55mm, Radiation Hardening=No, Width=850um
R3: library part CMP-02407-010205-1, "RES SMD 1 MEGA OHM 1% 1/8W 0603", Case/Package=0603, Max Operating Temperature=125°C, Min Operating Temperature=-55°C, Resistance=1MR, Temperature Coefficient=25ppm/°C, Tolerance=0.1%, Composition="Thin Film", Contact Plating=Tin, Height=450um, Lead Free="Lead Free", Length=1.55mm, Radiation Hardening=No, Width=850um
R4 R15: library part CMP-03412-011068-1, "RES 33 OHM 1% 1/4W 0603", Manufacturer=Yageo, Manufacturer Part Number=SR0603FR-7T33RL, Package=SR0603, Power Rating=0.25W, Resistance=33Ω, Temperature="-55°C to +155°C", Temperature Range High=+155°C, Temperature Range Low=-55°C, Tolerance=0.01, Voltage Rating=75V, Automotive=Yes, Automotive Grade="Grade 0", Category=Res, ComponentLink2Description=Datasheet, ComponentLink2URL=http://www.yageo.com/documents/recent/PYu-SR_D_F%20tol_RoHS_L_3.pdf, Composition="Thick Film", Device Class L1="Passive Components", Device Class L2=Resistors, Device Class L3="Chip SMD Resistors", Digikey Description="RES 33 OHM 1% 1/4W 0603", Footprint Url=http://www.yageo.com/exep/pages/download/literatures/PYu-R_Mount_10.pdf, Height=0.55mm, Ipc Land Pattern Name=RESC16080X45, Lead Free=Yes, Octopart=https://octopart.com/sr0603fr-7t33rl-yageo-92673856, RoHS=TRUE, Series=SR